# EAGLE board ADXL362WakeOnShake-Panel-v11 (EAGLE 6.5.0), part 1 of 3
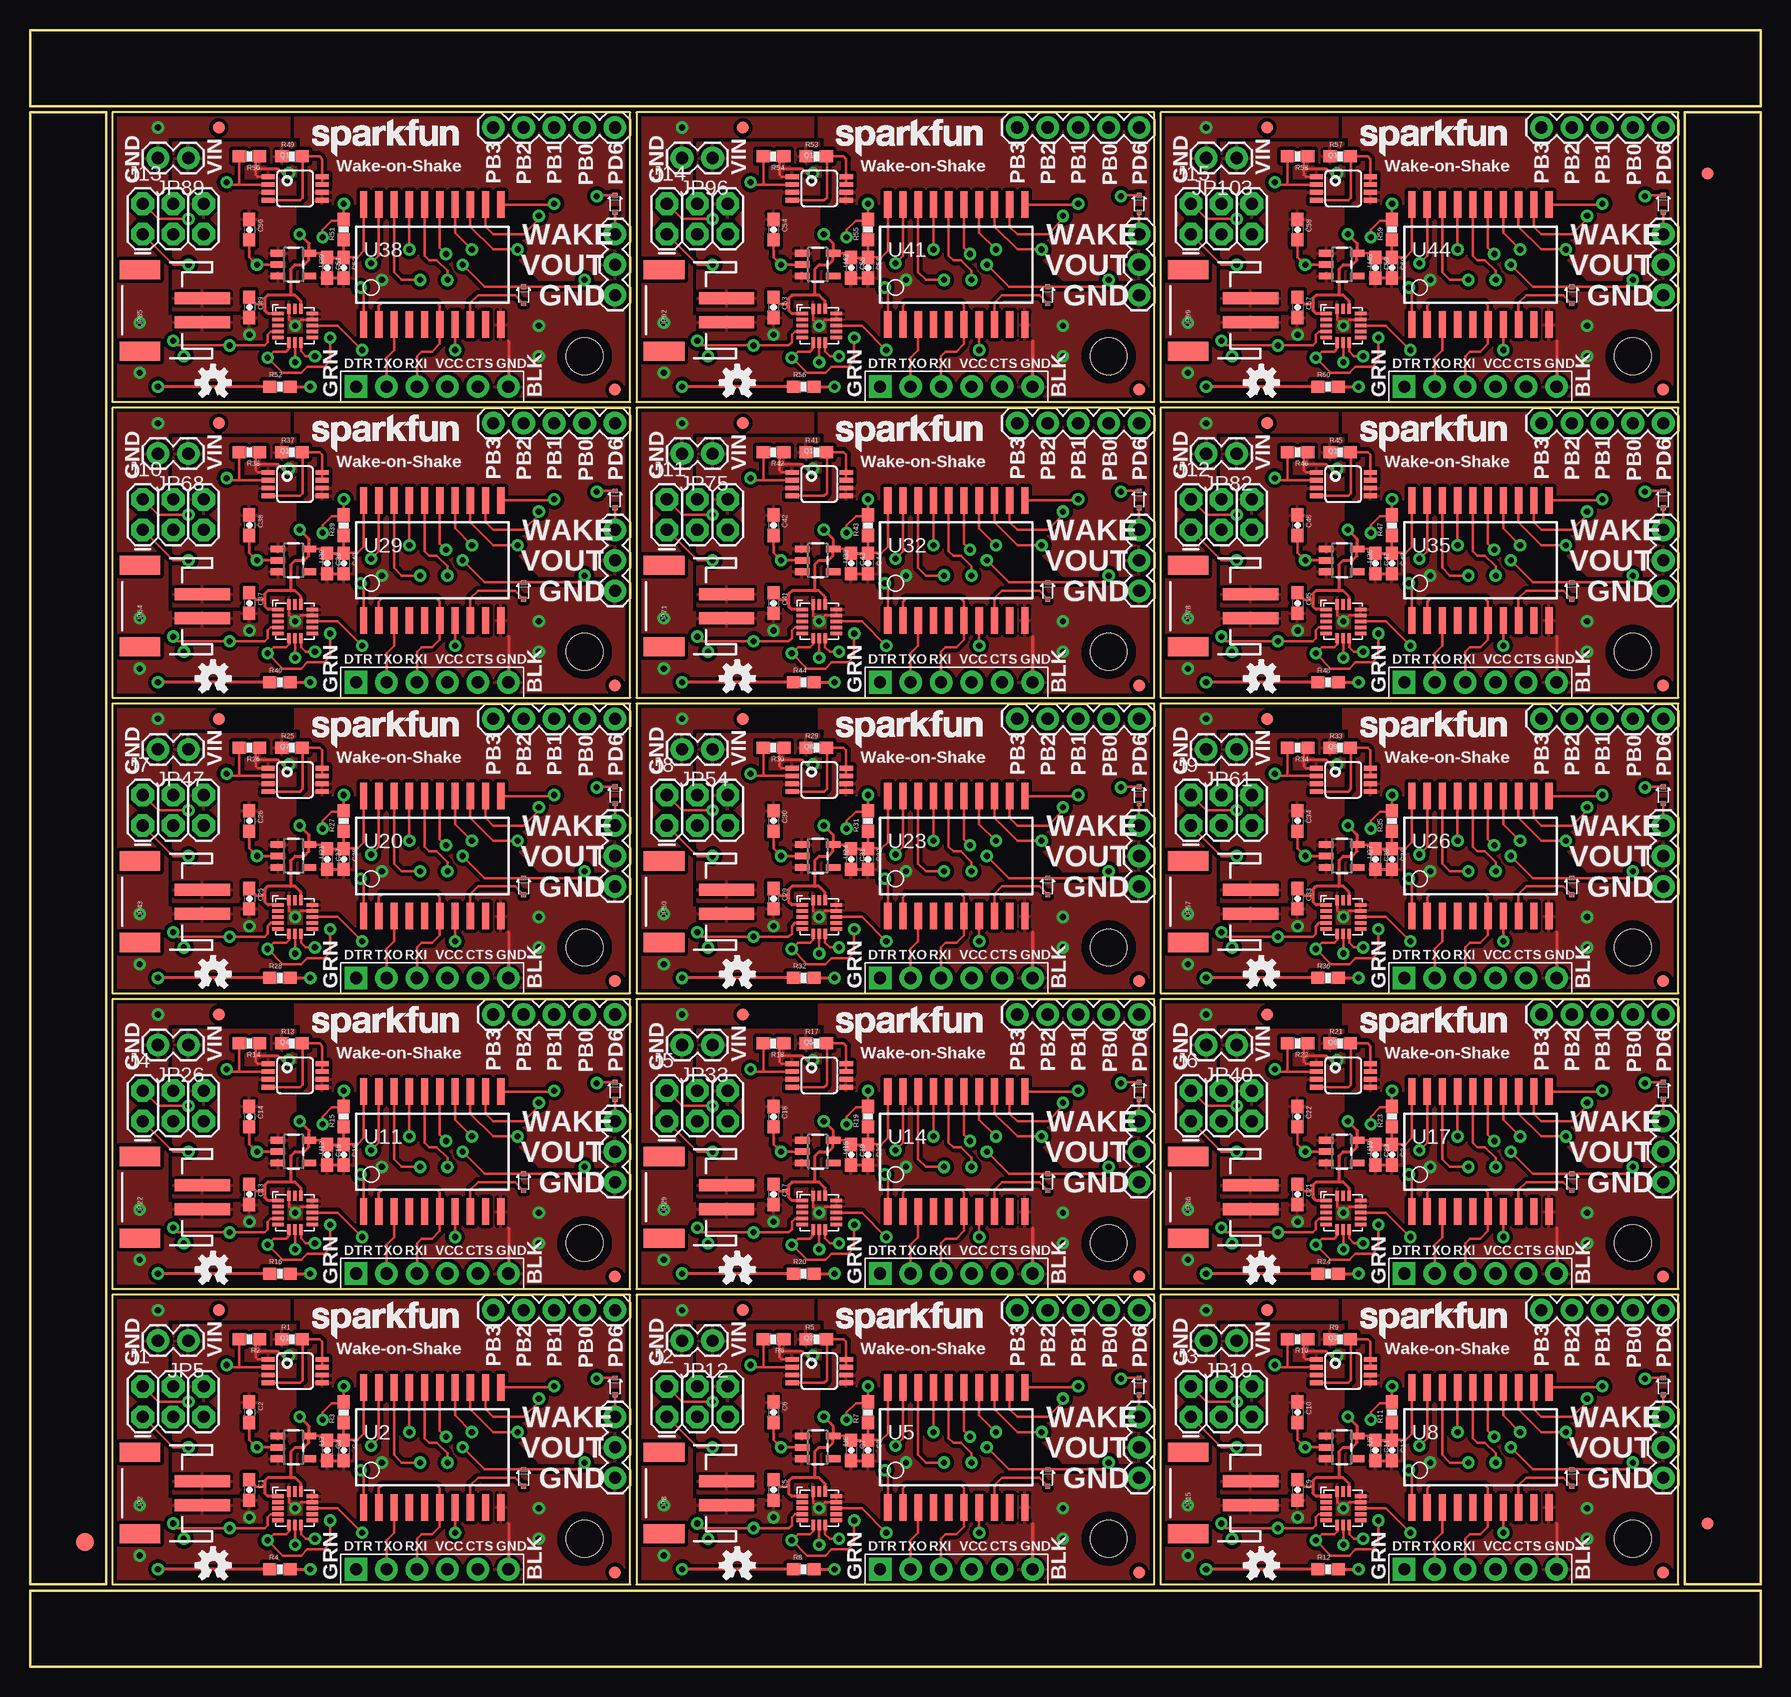
[diagram p0: board, top side]
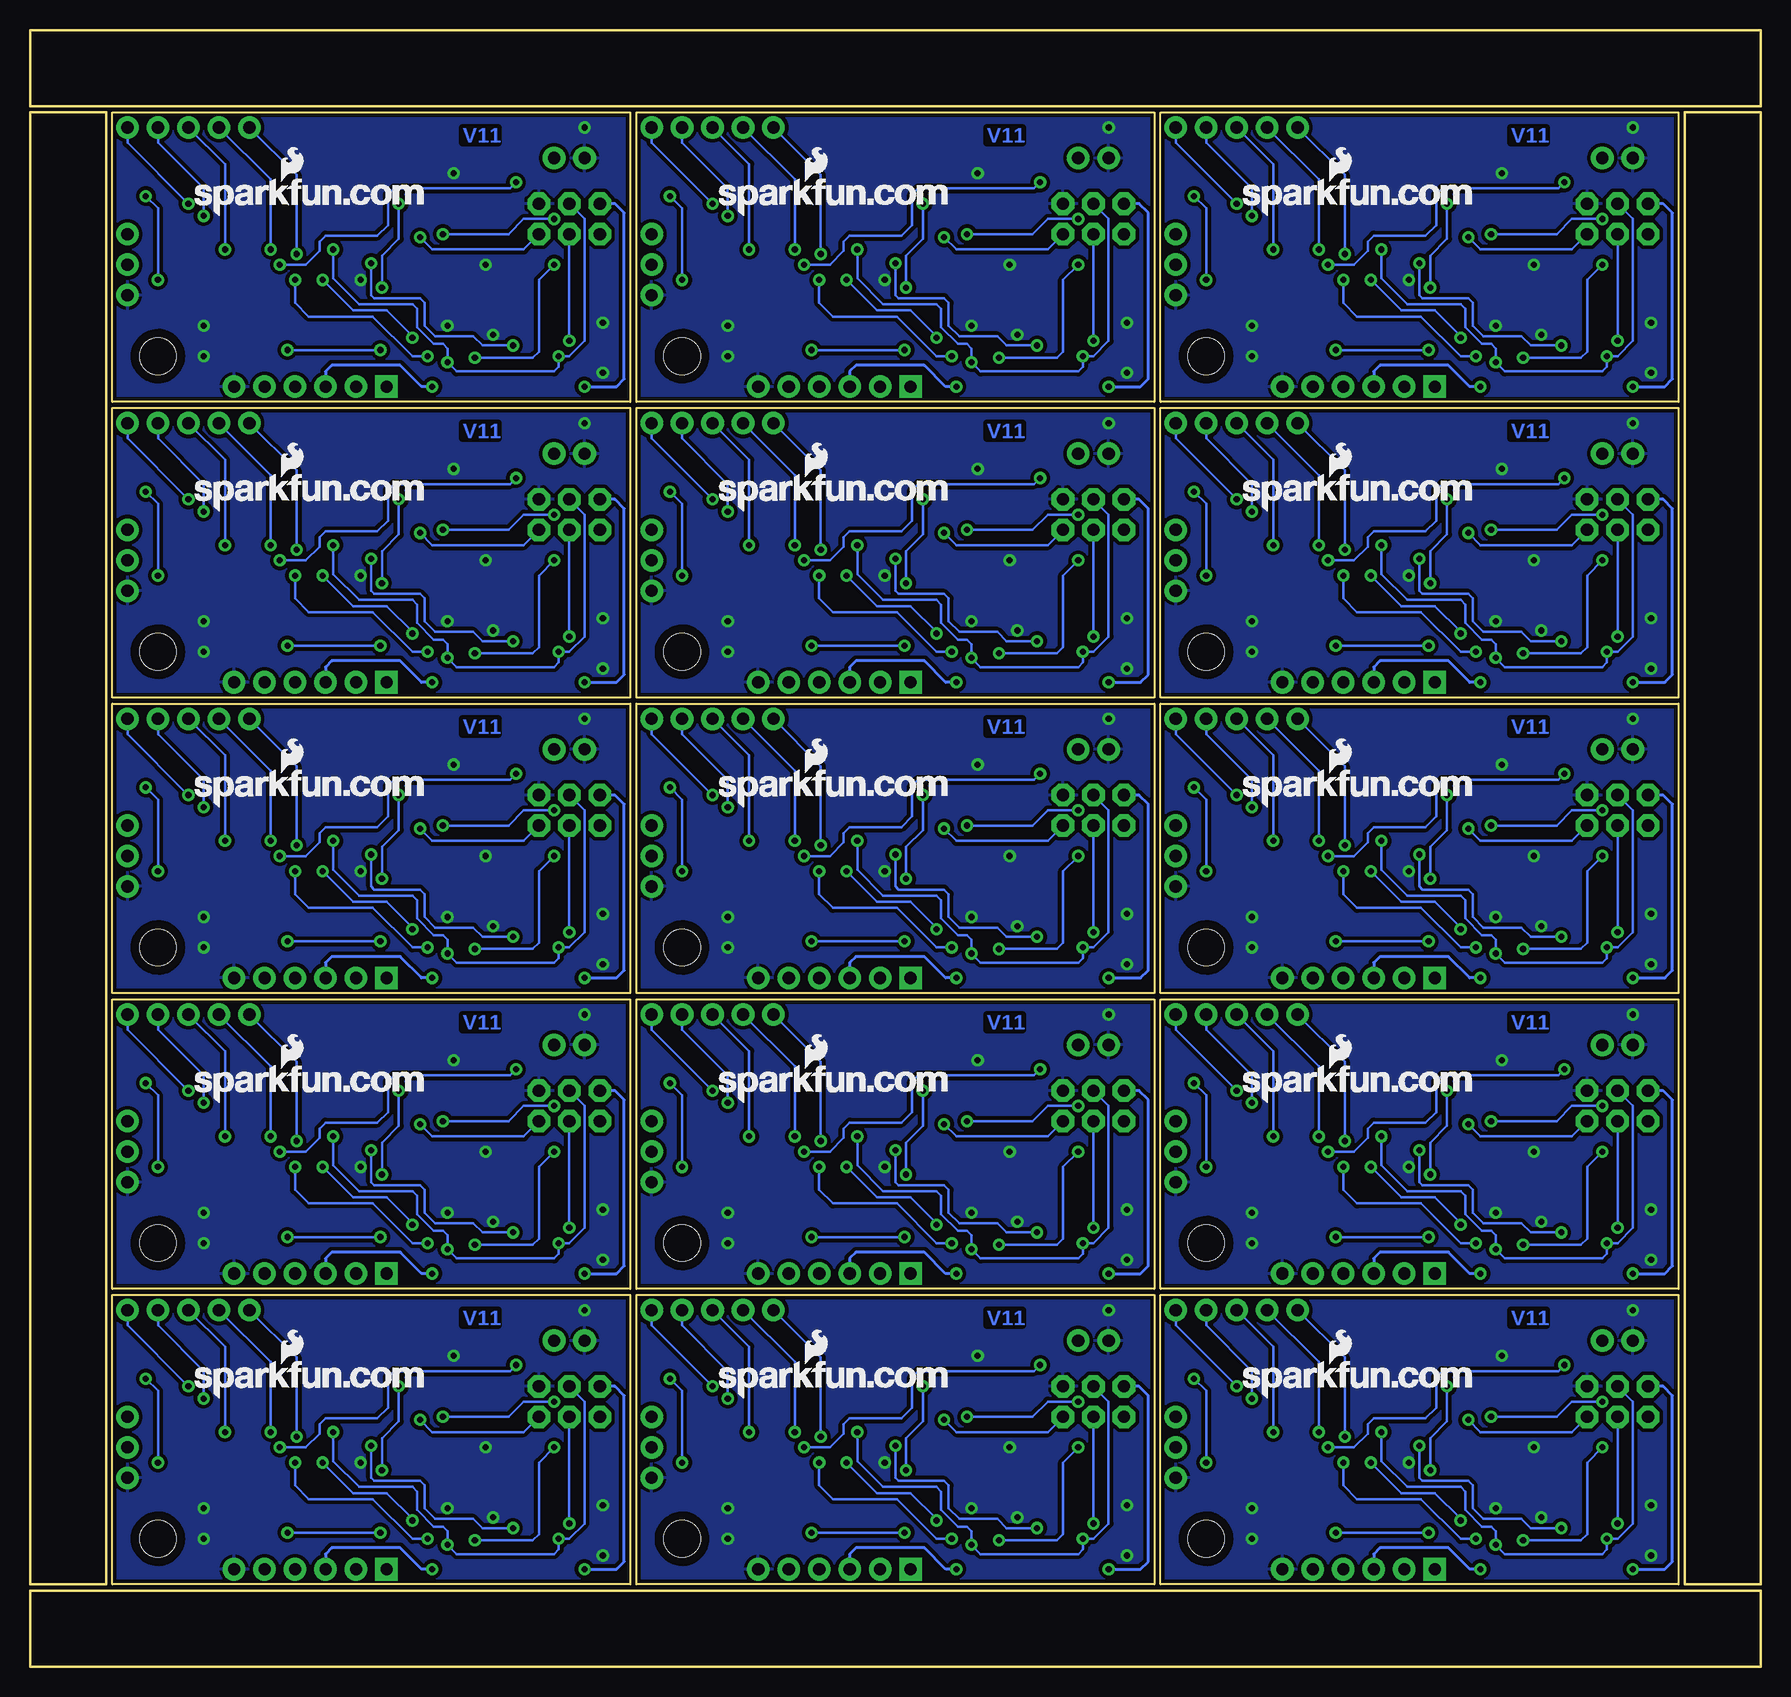
[diagram p1: board, bottom side, seen from below]

Size 144.27 x 136.4 mm. Coordinates in mm from the lower left corner, seen from the top.
Outline: 6.86,6.86 50.04,6.86 50.04,30.99 6.86,30.99 6.86,6.86
Outline: 50.55,6.86 93.73,6.86 93.73,30.99 50.55,30.99 50.55,6.86
Outline: 94.23,6.86 137.41,6.86 137.41,30.99 94.23,30.99 94.23,6.86
Outline: 6.86,31.5 50.04,31.5 50.04,55.63 6.86,55.63 6.86,31.5
Outline: 50.55,31.5 93.73,31.5 93.73,55.63 50.55,55.63 50.55,31.5
Outline: 94.23,31.5 137.41,31.5 137.41,55.63 94.23,55.63 94.23,31.5
Outline: 6.86,56.13 50.04,56.13 50.04,80.26 6.86,80.26 6.86,56.13
Outline: 50.55,56.13 93.73,56.13 93.73,80.26 50.55,80.26 50.55,56.13
Outline: 94.23,56.13 137.41,56.13 137.41,80.26 94.23,80.26 94.23,56.13
Outline: 6.86,80.77 50.04,80.77 50.04,104.9 6.86,104.9 6.86,80.77
Outline: 50.55,80.77 93.73,80.77 93.73,104.9 50.55,104.9 50.55,80.77
Outline: 94.23,80.77 137.41,80.77 137.41,104.9 94.23,104.9 94.23,80.77
Outline: 6.86,105.41 50.04,105.41 50.04,129.54 6.86,129.54 6.86,105.41
Outline: 50.55,105.41 93.73,105.41 93.73,129.54 50.55,129.54 50.55,105.41
Outline: 94.23,105.41 137.41,105.41 137.41,129.54 94.23,129.54 94.23,105.41
Outline: 6.35,6.86 6.35,129.54 0,129.54 0,6.86 6.35,6.86
Outline: 0,0 144.27,0 144.27,6.35 0,6.35 0,0
Outline: 144.27,6.86 144.27,129.54 137.92,129.54 137.92,6.86 144.27,6.86
Outline: 144.27,136.4 0,136.4 0,130.05 144.27,130.05 144.27,136.4
Copper layers (1*16): Top 0.035mm / dielectric 1.5mm / Bottom 0.035mm
Design rules "SparkFun-2-layer": minimum track width 7mil, minimum drill 15mil, track to track 8mil, track to pad 8mil, pad to pad 8mil, via to via 8mil, smd to smd 8mil, copper to edge 8mil, drill to drill 8mil, minimum pad ring 12mil, minimum via ring 10mil, stop-mask expansion 4mil, vias tented up to drill 20mil, thermal gap 10mil

## Footprints (pad centres in the part's own frame; a part is rotated, then mirrored left to right if it is on the bottom)
0603-CAP = smd 1.1 x 1: 1 -0.85,0; 2 0.85,0
SOD-523 = smd 0.4 x 0.4: A -0.7,0; C 0.7,0
FIDUCIAL-1.5X3 = smd 1.5 x 1.5: 1 0,0
FIDUCIAL-1X2 = smd 1 x 1: 1 0,0
2X3 = drill 1.016 pad 1.88 octagon: 1 0,0; 2 0,2.54; 3 2.54,0; 4 2.54,2.54; 5 5.08,0; 6 5.08,2.54
FTDI_DEVICE_SIDE = drill 1.016 pad 1.88 square: P$1 -6.35,0 | drill 1.016 pad 1.88: P$2 -3.81,0; P$3 -1.27,0; P$4 1.27,0; P$5 3.81,0; P$6 6.35,0
JST-2-SMD = smd 1 x 4.6: 1 -1,-3.7; 2 1,-3.7 | smd 1.6 x 3.4: NC1 -3.4,1.5; NC2 3.4,1.5
1X03 = drill 1.016 pad 1.88: 1 0,0; 2 2.54,0; 3 5.08,0
1X02 = drill 1.016 pad 1.88: 1 0,0; 2 2.54,0
1X05 = drill 1.016 pad 1.88: 1 0,0; 2 2.54,0; 3 5.08,0; 4 7.62,0; 5 10.16,0
MSOP8 = smd 0.4 x 1.1: 1 -0.975,-2.25; 2 -0.325,-2.25; 3 0.325,-2.25; 4 0.975,-2.25; 5 0.975,2.25; 6 0.325,2.25; 7 -0.325,2.25; 8 -0.975,2.25
0603-RES = smd 1.1 x 1: 1 -0.85,0; 2 0.85,0
ADXL362-1:1 = smd 0.952 x 0.3: P$1 -1.426,1; P$2 -1.426,0.5; P$3 -1.426,0; P$4 -1.426,-0.5; P$5 -1.426,-1; P$9 1.426,-1; P$10 1.426,-0.5; P$11 1.426,0; P$12 1.426,0.5; P$13 1.426,1 | smd 0.3 x 0.851: P$6 -0.5,-1.402; P$7 0,-1.402; P$8 0.5,-1.402; P$14 0.5,1.402; P$15 0,1.402; P$16 -0.5,1.402
SOP20W = smd 0.6 x 2.2: 1 -5.715,-5; 2 -4.445,-5; 3 -3.175,-5; 4 -1.905,-5; 5 -0.635,-5; 6 0.635,-5; 7 1.905,-5; 8 3.175,-5; 9 4.445,-5; 10 5.715,-5; 11 5.715,5; 12 4.445,5; 13 3.175,5; 14 1.905,5; 15 0.635,5; 16 -0.635,5; 17 -1.905,5; 18 -3.175,5; 19 -4.445,5; 20 -5.715,5
SOT23-5 = smd 0.55 x 1.2: 1 -0.95,-1.3; 2 0,-1.3; 3 0.95,-1.3; 4 0.95,1.3; 5 -0.95,1.3
STAND-OFF-TIGHT = hole 3.048: 0,0

## Placement (x,y rotation side)
C1  .1uF  [0603-CAP]  18.29,14.73 270 top
C2  1uF  [0603-CAP]  18.29,21.21 270 top
C3  1uF  [0603-CAP]  24.77,18.03 270 top
C4  .1uF  [0603-CAP]  26.16,18.03 270 top
C5  .1uF  [0603-CAP]  61.98,14.73 270 top
C6  1uF  [0603-CAP]  61.98,21.21 270 top
C7  1uF  [0603-CAP]  68.45,18.03 270 top
C8  .1uF  [0603-CAP]  69.85,18.03 270 top
C9  .1uF  [0603-CAP]  105.66,14.73 270 top
C10  1uF  [0603-CAP]  105.66,21.21 270 top
C11  1uF  [0603-CAP]  112.14,18.03 270 top
C12  .1uF  [0603-CAP]  113.54,18.03 270 top
C13  .1uF  [0603-CAP]  18.29,39.37 270 top
C14  1uF  [0603-CAP]  18.29,45.85 270 top
C15  1uF  [0603-CAP]  24.77,42.67 270 top
C16  .1uF  [0603-CAP]  26.16,42.67 270 top
C17  .1uF  [0603-CAP]  61.98,39.37 270 top
C18  1uF  [0603-CAP]  61.98,45.85 270 top
C19  1uF  [0603-CAP]  68.45,42.67 270 top
C20  .1uF  [0603-CAP]  69.85,42.67 270 top
C21  .1uF  [0603-CAP]  105.66,39.37 270 top
C22  1uF  [0603-CAP]  105.66,45.85 270 top
C23  1uF  [0603-CAP]  112.14,42.67 270 top
C24  .1uF  [0603-CAP]  113.54,42.67 270 top
C25  .1uF  [0603-CAP]  18.29,64.01 270 top
C26  1uF  [0603-CAP]  18.29,70.48 270 top
C27  1uF  [0603-CAP]  24.77,67.31 270 top
C28  .1uF  [0603-CAP]  26.16,67.31 270 top
C29  .1uF  [0603-CAP]  61.98,64.01 270 top
C30  1uF  [0603-CAP]  61.98,70.48 270 top
C31  1uF  [0603-CAP]  68.45,67.31 270 top
C32  .1uF  [0603-CAP]  69.85,67.31 270 top
C33  .1uF  [0603-CAP]  105.66,64.01 270 top
C34  1uF  [0603-CAP]  105.66,70.48 270 top
C35  1uF  [0603-CAP]  112.14,67.31 270 top
C36  .1uF  [0603-CAP]  113.54,67.31 270 top
C37  .1uF  [0603-CAP]  18.29,88.65 270 top
C38  1uF  [0603-CAP]  18.29,95.12 270 top
C39  1uF  [0603-CAP]  24.77,91.95 270 top
C40  .1uF  [0603-CAP]  26.16,91.95 270 top
C41  .1uF  [0603-CAP]  61.98,88.65 270 top
C42  1uF  [0603-CAP]  61.98,95.12 270 top
C43  1uF  [0603-CAP]  68.45,91.95 270 top
C44  .1uF  [0603-CAP]  69.85,91.95 270 top
C45  .1uF  [0603-CAP]  105.66,88.65 270 top
C46  1uF  [0603-CAP]  105.66,95.12 270 top
C47  1uF  [0603-CAP]  112.14,91.95 270 top
C48  .1uF  [0603-CAP]  113.54,91.95 270 top
C49  .1uF  [0603-CAP]  18.29,113.28 270 top
C50  1uF  [0603-CAP]  18.29,119.76 270 top
C51  1uF  [0603-CAP]  24.77,116.59 270 top
C52  .1uF  [0603-CAP]  26.16,116.59 270 top
C53  .1uF  [0603-CAP]  61.98,113.28 270 top
C54  1uF  [0603-CAP]  61.98,119.76 270 top
C55  1uF  [0603-CAP]  68.45,116.59 270 top
C56  .1uF  [0603-CAP]  69.85,116.59 270 top
C57  .1uF  [0603-CAP]  105.66,113.28 270 top
C58  1uF  [0603-CAP]  105.66,119.76 270 top
C59  1uF  [0603-CAP]  112.14,116.59 270 top
C60  .1uF  [0603-CAP]  113.54,116.59 270 top
D1  RB751  [SOD-523]  48.77,23.37 90 top
D2  RB751  [SOD-523]  41.15,15.75 90 top
D3  RB751  [SOD-523]  92.46,23.37 90 top
D4  RB751  [SOD-523]  84.84,15.75 90 top
D5  RB751  [SOD-523]  136.14,23.37 90 top
D6  RB751  [SOD-523]  128.52,15.75 90 top
D7  RB751  [SOD-523]  48.77,48.01 90 top
D8  RB751  [SOD-523]  41.15,40.39 90 top
D9  RB751  [SOD-523]  92.46,48.01 90 top
D10  RB751  [SOD-523]  84.84,40.39 90 top
D11  RB751  [SOD-523]  136.14,48.01 90 top
D12  RB751  [SOD-523]  128.52,40.39 90 top
D13  RB751  [SOD-523]  48.77,72.64 90 top
D14  RB751  [SOD-523]  41.15,65.02 90 top
D15  RB751  [SOD-523]  92.46,72.64 90 top
D16  RB751  [SOD-523]  84.84,65.02 90 top
D17  RB751  [SOD-523]  136.14,72.64 90 top
D18  RB751  [SOD-523]  128.52,65.02 90 top
D19  RB751  [SOD-523]  48.77,97.28 90 top
D20  RB751  [SOD-523]  41.15,89.66 90 top
D21  RB751  [SOD-523]  92.46,97.28 90 top
D22  RB751  [SOD-523]  84.84,89.66 90 top
D23  RB751  [SOD-523]  136.14,97.28 90 top
D24  RB751  [SOD-523]  128.52,89.66 90 top
D25  RB751  [SOD-523]  48.77,121.92 90 top
D26  RB751  [SOD-523]  41.15,114.3 90 top
D27  RB751  [SOD-523]  92.46,121.92 90 top
D28  RB751  [SOD-523]  84.84,114.3 90 top
D29  RB751  [SOD-523]  136.14,121.92 90 top
D30  RB751  [SOD-523]  128.52,114.3 90 top
E$1  [FIDUCIAL-1.5X3]  4.57,10.41 0 top
E$4  [FIDUCIAL-1X2]  139.83,11.94 0 top
E$5  [FIDUCIAL-1X2]  139.83,124.46 180 top
FID1  FIDUCIAL1X2  [FIDUCIAL-1X2]  48.77,7.87 0 top
FID2  FIDUCIAL1X2  [FIDUCIAL-1X2]  15.75,29.72 0 top
FID3  FIDUCIAL1X2  [FIDUCIAL-1X2]  92.46,7.87 0 top
FID4  FIDUCIAL1X2  [FIDUCIAL-1X2]  59.44,29.72 0 top
FID5  FIDUCIAL1X2  [FIDUCIAL-1X2]  136.14,7.87 0 top
FID6  FIDUCIAL1X2  [FIDUCIAL-1X2]  103.12,29.72 0 top
FID7  FIDUCIAL1X2  [FIDUCIAL-1X2]  48.77,32.51 0 top
FID8  FIDUCIAL1X2  [FIDUCIAL-1X2]  15.75,54.36 0 top
FID9  FIDUCIAL1X2  [FIDUCIAL-1X2]  92.46,32.51 0 top
FID10  FIDUCIAL1X2  [FIDUCIAL-1X2]  59.44,54.36 0 top
FID11  FIDUCIAL1X2  [FIDUCIAL-1X2]  136.14,32.51 0 top
FID12  FIDUCIAL1X2  [FIDUCIAL-1X2]  103.12,54.36 0 top
FID13  FIDUCIAL1X2  [FIDUCIAL-1X2]  48.77,57.15 0 top
FID14  FIDUCIAL1X2  [FIDUCIAL-1X2]  15.75,78.99 0 top
FID15  FIDUCIAL1X2  [FIDUCIAL-1X2]  92.46,57.15 0 top
FID16  FIDUCIAL1X2  [FIDUCIAL-1X2]  59.44,78.99 0 top
FID17  FIDUCIAL1X2  [FIDUCIAL-1X2]  136.14,57.15 0 top
FID18  FIDUCIAL1X2  [FIDUCIAL-1X2]  103.12,78.99 0 top
FID19  FIDUCIAL1X2  [FIDUCIAL-1X2]  48.77,81.79 0 top
FID20  FIDUCIAL1X2  [FIDUCIAL-1X2]  15.75,103.63 0 top
FID21  FIDUCIAL1X2  [FIDUCIAL-1X2]  92.46,81.79 0 top
FID22  FIDUCIAL1X2  [FIDUCIAL-1X2]  59.44,103.63 0 top
FID23  FIDUCIAL1X2  [FIDUCIAL-1X2]  136.14,81.79 0 top
FID24  FIDUCIAL1X2  [FIDUCIAL-1X2]  103.12,103.63 0 top
FID25  FIDUCIAL1X2  [FIDUCIAL-1X2]  48.77,106.43 0 top
FID26  FIDUCIAL1X2  [FIDUCIAL-1X2]  15.75,128.27 0 top
FID27  FIDUCIAL1X2  [FIDUCIAL-1X2]  92.46,106.43 0 top
FID28  FIDUCIAL1X2  [FIDUCIAL-1X2]  59.44,128.27 0 top
FID29  FIDUCIAL1X2  [FIDUCIAL-1X2]  136.14,106.43 0 top
FID30  FIDUCIAL1X2  [FIDUCIAL-1X2]  103.12,128.27 0 top
J1  PROG_HDR  [2X3]  9.4,20.83 0 top
J2  PROG_HDR  [2X3]  53.09,20.83 0 top
J3  PROG_HDR  [2X3]  96.77,20.83 0 top
J4  PROG_HDR  [2X3]  9.4,45.47 0 top
J5  PROG_HDR  [2X3]  53.09,45.47 0 top
J6  PROG_HDR  [2X3]  96.77,45.47 0 top
J7  PROG_HDR  [2X3]  9.4,70.1 0 top
J8  PROG_HDR  [2X3]  53.09,70.1 0 top
J9  PROG_HDR  [2X3]  96.77,70.1 0 top
J10  PROG_HDR  [2X3]  9.4,94.74 0 top
J11  PROG_HDR  [2X3]  53.09,94.74 0 top
J12  PROG_HDR  [2X3]  96.77,94.74 0 top
J13  PROG_HDR  [2X3]  9.4,119.38 0 top
J14  PROG_HDR  [2X3]  53.09,119.38 0 top
J15  PROG_HDR  [2X3]  96.77,119.38 0 top
JP1  FTDI_DEVICE  [FTDI_DEVICE_SIDE]  33.53,8.13 0 top
JP2  M02-JST-2MM-SMT  [JST-2-SMD]  10.67,14.48 90 top
JP3  [1X03]  48.77,20.83 270 top
JP4  LOGO-SFENW2  [SFE-NEW-WEB]  23.5,27.3 0 top
JP5  M02PTH  [1X02]  13.21,27.18 180 top
JP6  LOGO-SFENEW  [SFE-NEW-WEBLOGO]  43.18,22.35 0 bottom
JP7  [1X05]  38.61,29.72 0 top
JP8  M02-JST-2MM-SMT  [JST-2-SMD]  54.36,14.48 90 top
JP9  [1X03]  92.46,20.83 270 top
JP10  FTDI_DEVICE  [FTDI_DEVICE_SIDE]  77.22,8.13 0 top
JP11  LOGO-SFENW2  [SFE-NEW-WEB]  67.18,27.3 0 top
JP12  M02PTH  [1X02]  56.9,27.18 180 top
JP13  LOGO-SFENEW  [SFE-NEW-WEBLOGO]  86.87,22.35 0 bottom
JP14  [1X05]  82.3,29.72 0 top
JP15  M02-JST-2MM-SMT  [JST-2-SMD]  98.04,14.48 90 top
JP16  [1X03]  136.14,20.83 270 top
JP17  FTDI_DEVICE  [FTDI_DEVICE_SIDE]  120.9,8.13 0 top
JP18  LOGO-SFENW2  [SFE-NEW-WEB]  110.87,27.3 0 top
JP19  M02PTH  [1X02]  100.58,27.18 180 top
JP20  LOGO-SFENEW  [SFE-NEW-WEBLOGO]  130.56,22.35 0 bottom
JP21  [1X05]  125.98,29.72 0 top
JP22  M02-JST-2MM-SMT  [JST-2-SMD]  10.67,39.12 90 top
JP23  [1X03]  48.77,45.47 270 top
JP24  FTDI_DEVICE  [FTDI_DEVICE_SIDE]  33.53,32.77 0 top
JP25  LOGO-SFENW2  [SFE-NEW-WEB]  23.5,51.94 0 top
JP26  M02PTH  [1X02]  13.21,51.82 180 top
JP27  LOGO-SFENEW  [SFE-NEW-WEBLOGO]  43.18,46.99 0 bottom
JP28  [1X05]  38.61,54.36 0 top
JP29  M02-JST-2MM-SMT  [JST-2-SMD]  54.36,39.12 90 top
JP30  [1X03]  92.46,45.47 270 top
JP31  FTDI_DEVICE  [FTDI_DEVICE_SIDE]  77.22,32.77 0 top
JP32  LOGO-SFENW2  [SFE-NEW-WEB]  67.18,51.94 0 top
JP33  M02PTH  [1X02]  56.9,51.82 180 top
JP34  LOGO-SFENEW  [SFE-NEW-WEBLOGO]  86.87,46.99 0 bottom
JP35  [1X05]  82.3,54.36 0 top
JP36  M02-JST-2MM-SMT  [JST-2-SMD]  98.04,39.12 90 top
JP37  [1X03]  136.14,45.47 270 top
JP38  FTDI_DEVICE  [FTDI_DEVICE_SIDE]  120.9,32.77 0 top
JP39  LOGO-SFENW2  [SFE-NEW-WEB]  110.87,51.94 0 top
JP40  M02PTH  [1X02]  100.58,51.82 180 top
JP41  LOGO-SFENEW  [SFE-NEW-WEBLOGO]  130.56,46.99 0 bottom
JP42  [1X05]  125.98,54.36 0 top
JP43  M02-JST-2MM-SMT  [JST-2-SMD]  10.67,63.75 90 top
JP44  [1X03]  48.77,70.1 270 top
JP45  FTDI_DEVICE  [FTDI_DEVICE_SIDE]  33.53,57.4 0 top
JP46  LOGO-SFENW2  [SFE-NEW-WEB]  23.5,76.58 0 top
JP47  M02PTH  [1X02]  13.21,76.45 180 top
JP48  LOGO-SFENEW  [SFE-NEW-WEBLOGO]  43.18,71.63 0 bottom
JP49  [1X05]  38.61,78.99 0 top
JP50  M02-JST-2MM-SMT  [JST-2-SMD]  54.36,63.75 90 top
JP51  [1X03]  92.46,70.1 270 top
JP52  FTDI_DEVICE  [FTDI_DEVICE_SIDE]  77.22,57.4 0 top
JP53  LOGO-SFENW2  [SFE-NEW-WEB]  67.18,76.58 0 top
JP54  M02PTH  [1X02]  56.9,76.45 180 top
JP55  LOGO-SFENEW  [SFE-NEW-WEBLOGO]  86.87,71.63 0 bottom
JP56  [1X05]  82.3,78.99 0 top
JP57  M02-JST-2MM-SMT  [JST-2-SMD]  98.04,63.75 90 top
JP58  [1X03]  136.14,70.1 270 top
JP59  FTDI_DEVICE  [FTDI_DEVICE_SIDE]  120.9,57.4 0 top
JP60  LOGO-SFENW2  [SFE-NEW-WEB]  110.87,76.58 0 top
JP61  M02PTH  [1X02]  100.58,76.45 180 top
JP62  LOGO-SFENEW  [SFE-NEW-WEBLOGO]  130.56,71.63 0 bottom
JP63  [1X05]  125.98,78.99 0 top
JP64  M02-JST-2MM-SMT  [JST-2-SMD]  10.67,88.39 90 top
JP65  [1X03]  48.77,94.74 270 top
JP66  FTDI_DEVICE  [FTDI_DEVICE_SIDE]  33.53,82.04 0 top
JP67  LOGO-SFENW2  [SFE-NEW-WEB]  23.5,101.22 0 top
JP68  M02PTH  [1X02]  13.21,101.09 180 top
JP69  LOGO-SFENEW  [SFE-NEW-WEBLOGO]  43.18,96.27 0 bottom
JP70  [1X05]  38.61,103.63 0 top
JP71  M02-JST-2MM-SMT  [JST-2-SMD]  54.36,88.39 90 top
JP72  [1X03]  92.46,94.74 270 top
JP73  FTDI_DEVICE  [FTDI_DEVICE_SIDE]  77.22,82.04 0 top
JP74  LOGO-SFENW2  [SFE-NEW-WEB]  67.18,101.22 0 top
JP75  M02PTH  [1X02]  56.9,101.09 180 top
JP76  LOGO-SFENEW  [SFE-NEW-WEBLOGO]  86.87,96.27 0 bottom
JP77  [1X05]  82.3,103.63 0 top
JP78  M02-JST-2MM-SMT  [JST-2-SMD]  98.04,88.39 90 top
JP79  [1X03]  136.14,94.74 270 top
JP80  FTDI_DEVICE  [FTDI_DEVICE_SIDE]  120.9,82.04 0 top
JP81  LOGO-SFENW2  [SFE-NEW-WEB]  110.87,101.22 0 top
JP82  M02PTH  [1X02]  100.58,101.09 180 top
JP83  LOGO-SFENEW  [SFE-NEW-WEBLOGO]  130.56,96.27 0 bottom
JP84  [1X05]  125.98,103.63 0 top
JP85  M02-JST-2MM-SMT  [JST-2-SMD]  10.67,113.03 90 top
JP86  [1X03]  48.77,119.38 270 top
JP87  FTDI_DEVICE  [FTDI_DEVICE_SIDE]  33.53,106.68 0 top
JP88  LOGO-SFENW2  [SFE-NEW-WEB]  23.5,125.86 0 top
JP89  M02PTH  [1X02]  13.21,125.73 180 top
JP90  LOGO-SFENEW  [SFE-NEW-WEBLOGO]  43.18,120.9 0 bottom
JP91  [1X05]  38.61,128.27 0 top
JP92  M02-JST-2MM-SMT  [JST-2-SMD]  54.36,113.03 90 top
JP93  [1X03]  92.46,119.38 270 top
JP94  FTDI_DEVICE  [FTDI_DEVICE_SIDE]  77.22,106.68 0 top
JP95  LOGO-SFENW2  [SFE-NEW-WEB]  67.18,125.86 0 top
JP96  M02PTH  [1X02]  56.9,125.73 180 top
JP97  LOGO-SFENEW  [SFE-NEW-WEBLOGO]  86.87,120.9 0 bottom
JP98  [1X05]  82.3,128.27 0 top
JP99  M02-JST-2MM-SMT  [JST-2-SMD]  98.04,113.03 90 top
JP100  [1X03]  136.14,119.38 270 top
JP101  FTDI_DEVICE  [FTDI_DEVICE_SIDE]  120.9,106.68 0 top
JP102  LOGO-SFENW2  [SFE-NEW-WEB]  110.87,125.86 0 top
JP103  M02PTH  [1X02]  100.58,125.73 180 top
JP104  LOGO-SFENEW  [SFE-NEW-WEBLOGO]  130.56,120.9 0 bottom
JP105  [1X05]  125.98,128.27 0 top
Q1  [MSOP8]  22.1,24.64 270 top
Q2  [MSOP8]  65.79,24.64 270 top
Q3  [MSOP8]  109.47,24.64 270 top
Q4  [MSOP8]  22.1,49.28 270 top
Q5  [MSOP8]  65.79,49.28 270 top
Q6  [MSOP8]  109.47,49.28 270 top
Q7  [MSOP8]  22.1,73.91 270 top
Q8  [MSOP8]  65.79,73.91 270 top
Q9  [MSOP8]  109.47,73.91 270 top
Q10  [MSOP8]  22.1,98.55 270 top
Q11  [MSOP8]  65.79,98.55 270 top
Q12  [MSOP8]  109.47,98.55 270 top
Q13  [MSOP8]  22.1,123.19 270 top
Q14  [MSOP8]  65.79,123.19 270 top
Q15  [MSOP8]  109.47,123.19 270 top
R1  1M  [0603-RES]  21.84,27.3 0 top
R2  1M  [0603-RES]  18.29,27.3 180 top
R3  10k  [0603-RES]  26.16,21.21 90 top
R4  10k  [0603-RES]  20.83,8.13 0 top
R5  1M  [0603-RES]  65.53,27.3 0 top
R6  1M  [0603-RES]  61.98,27.3 180 top
R7  10k  [0603-RES]  69.85,21.21 90 top
R8  10k  [0603-RES]  64.52,8.13 0 top
R9  1M  [0603-RES]  109.22,27.3 0 top
R10  1M  [0603-RES]  105.66,27.3 180 top
R11  10k  [0603-RES]  113.54,21.21 90 top
R12  10k  [0603-RES]  108.2,8.13 0 top
R13  1M  [0603-RES]  21.84,51.94 0 top
R14  1M  [0603-RES]  18.29,51.94 180 top
R15  10k  [0603-RES]  26.16,45.85 90 top
R16  10k  [0603-RES]  20.83,32.77 0 top
R17  1M  [0603-RES]  65.53,51.94 0 top
R18  1M  [0603-RES]  61.98,51.94 180 top
R19  10k  [0603-RES]  69.85,45.85 90 top
R20  10k  [0603-RES]  64.52,32.77 0 top
R21  1M  [0603-RES]  109.22,51.94 0 top
R22  1M  [0603-RES]  105.66,51.94 180 top
R23  10k  [0603-RES]  113.54,45.85 90 top
R24  10k  [0603-RES]  108.2,32.77 0 top
R25  1M  [0603-RES]  21.84,76.58 0 top
R26  1M  [0603-RES]  18.29,76.58 180 top
R27  10k  [0603-RES]  26.16,70.48 90 top
R28  10k  [0603-RES]  20.83,57.4 0 top
R29  1M  [0603-RES]  65.53,76.58 0 top
R30  1M  [0603-RES]  61.98,76.58 180 top
R31  10k  [0603-RES]  69.85,70.48 90 top
R32  10k  [0603-RES]  64.52,57.4 0 top
R33  1M  [0603-RES]  109.22,76.58 0 top
R34  1M  [0603-RES]  105.66,76.58 180 top
R35  10k  [0603-RES]  113.54,70.48 90 top
R36  10k  [0603-RES]  108.2,57.4 0 top
R37  1M  [0603-RES]  21.84,101.22 0 top
R38  1M  [0603-RES]  18.29,101.22 180 top
R39  10k  [0603-RES]  26.16,95.12 90 top
R40  10k  [0603-RES]  20.83,82.04 0 top
R41  1M  [0603-RES]  65.53,101.22 0 top
R42  1M  [0603-RES]  61.98,101.22 180 top
R43  10k  [0603-RES]  69.85,95.12 90 top
R44  10k  [0603-RES]  64.52,82.04 0 top
R45  1M  [0603-RES]  109.22,101.22 0 top
R46  1M  [0603-RES]  105.66,101.22 180 top
R47  10k  [0603-RES]  113.54,95.12 90 top
R48  10k  [0603-RES]  108.2,82.04 0 top
R49  1M  [0603-RES]  21.84,125.86 0 top
R50  1M  [0603-RES]  18.29,125.86 180 top
R51  10k  [0603-RES]  26.16,119.76 90 top
R52  10k  [0603-RES]  20.83,106.68 0 top
R53  1M  [0603-RES]  65.53,125.86 0 top
R54  1M  [0603-RES]  61.98,125.86 180 top
R55  10k  [0603-RES]  69.85,119.76 90 top
R56  10k  [0603-RES]  64.52,106.68 0 top
R57  1M  [0603-RES]  109.22,125.86 0 top
R58  1M  [0603-RES]  105.66,125.86 180 top
R59  10k  [0603-RES]  113.54,119.76 90 top
R60  10k  [0603-RES]  108.2,106.68 0 top
U1  ADXL362  [ADXL362-1:1]  22.1,13.21 0 top
U2  [SOP20W]  33.53,18.29 0 top
U3  ADP160-3.3  [SOT23-5]  21.97,18.29 270 top
U4  ADXL362  [ADXL362-1:1]  65.79,13.21 0 top
U5  [SOP20W]  77.22,18.29 0 top
U6  ADP160-3.3  [SOT23-5]  65.66,18.29 270 top
U7  ADXL362  [ADXL362-1:1]  109.47,13.21 0 top
U8  [SOP20W]  120.9,18.29 0 top
U9  ADP160-3.3  [SOT23-5]  109.35,18.29 270 top
U10  ADXL362  [ADXL362-1:1]  22.1,37.85 0 top
U11  [SOP20W]  33.53,42.93 0 top
U12  ADP160-3.3  [SOT23-5]  21.97,42.93 270 top
U13  ADXL362  [ADXL362-1:1]  65.79,37.85 0 top
U14  [SOP20W]  77.22,42.93 0 top
U15  ADP160-3.3  [SOT23-5]  65.66,42.93 270 top
U16  ADXL362  [ADXL362-1:1]  109.47,37.85 0 top
U17  [SOP20W]  120.9,42.93 0 top
U18  ADP160-3.3  [SOT23-5]  109.35,42.93 270 top
U19  ADXL362  [ADXL362-1:1]  22.1,62.48 0 top
U20  [SOP20W]  33.53,67.56 0 top
U21  ADP160-3.3  [SOT23-5]  21.97,67.56 270 top
U22  ADXL362  [ADXL362-1:1]  65.79,62.48 0 top
U23  [SOP20W]  77.22,67.56 0 top
U24  ADP160-3.3  [SOT23-5]  65.66,67.56 270 top
U25  ADXL362  [ADXL362-1:1]  109.47,62.48 0 top
U26  [SOP20W]  120.9,67.56 0 top
U27  ADP160-3.3  [SOT23-5]  109.35,67.56 270 top
U28  ADXL362  [ADXL362-1:1]  22.1,87.12 0 top
U29  [SOP20W]  33.53,92.2 0 top
U30  ADP160-3.3  [SOT23-5]  21.97,92.2 270 top
U31  ADXL362  [ADXL362-1:1]  65.79,87.12 0 top
U32  [SOP20W]  77.22,92.2 0 top
U33  ADP160-3.3  [SOT23-5]  65.66,92.2 270 top
U34  ADXL362  [ADXL362-1:1]  109.47,87.12 0 top
U35  [SOP20W]  120.9,92.2 0 top
U36  ADP160-3.3  [SOT23-5]  109.35,92.2 270 top
U37  ADXL362  [ADXL362-1:1]  22.1,111.76 0 top
U38  [SOP20W]  33.53,116.84 0 top
U39  ADP160-3.3  [SOT23-5]  21.97,116.84 270 top
U40  ADXL362  [ADXL362-1:1]  65.79,111.76 0 top
U41  [SOP20W]  77.22,116.84 0 top
U42  ADP160-3.3  [SOT23-5]  65.66,116.84 270 top
U43  ADXL362  [ADXL362-1:1]  109.47,111.76 0 top
U44  [SOP20W]  120.9,116.84 0 top
U45  ADP160-3.3  [SOT23-5]  109.35,116.84 270 top
U$1  [STAND-OFF-TIGHT]  89.92,10.67 0 top
U$2  [OSHW-LOGO-S]  58.95,8.46 0 top
U$3  [OSHW-LOGO-S]  15.27,8.46 0 top
U$4  [STAND-OFF-TIGHT]  46.23,10.67 0 top
U$5  [STAND-OFF-TIGHT]  133.6,10.67 0 top
U$6  [OSHW-LOGO-S]  102.64,8.46 0 top
U$7  [STAND-OFF-TIGHT]  46.23,35.31 0 top
U$8  [OSHW-LOGO-S]  15.27,33.1 0 top
U$9  [STAND-OFF-TIGHT]  89.92,35.31 0 top
U$10  [OSHW-LOGO-S]  58.95,33.1 0 top
U$11  [STAND-OFF-TIGHT]  133.6,35.31 0 top
U$12  [OSHW-LOGO-S]  102.64,33.1 0 top
U$13  [STAND-OFF-TIGHT]  46.23,59.94 0 top
U$14  [OSHW-LOGO-S]  15.27,57.73 0 top
U$15  [STAND-OFF-TIGHT]  89.92,59.94 0 top
U$16  [OSHW-LOGO-S]  58.95,57.73 0 top
U$17  [STAND-OFF-TIGHT]  133.6,59.94 0 top
U$18  [OSHW-LOGO-S]  102.64,57.73 0 top
U$19  [STAND-OFF-TIGHT]  46.23,84.58 0 top
U$20  [OSHW-LOGO-S]  15.27,82.37 0 top
U$21  [STAND-OFF-TIGHT]  89.92,84.58 0 top
U$22  [OSHW-LOGO-S]  58.95,82.37 0 top
U$23  [STAND-OFF-TIGHT]  133.6,84.58 0 top
U$24  [OSHW-LOGO-S]  102.64,82.37 0 top
U$25  [STAND-OFF-TIGHT]  46.23,109.22 0 top
U$26  [OSHW-LOGO-S]  15.27,107.01 0 top
U$27  [STAND-OFF-TIGHT]  89.92,109.22 0 top
U$28  [OSHW-LOGO-S]  58.95,107.01 0 top
U$29  [STAND-OFF-TIGHT]  133.6,109.22 0 top
U$30  [OSHW-LOGO-S]  102.64,107.01 0 top

## Library data of the parts
C1 C4 C5 C8 C9 C12 C13 C16 C17 C20 C21 C24 C25 C28 C29 C32 C33 C36 C37 C40 C41 C44 C45 C48 C49 C52 C53 C56 C57 C60 = SparkFun-Capacitors; PROD_ID: CAP-00810
C2 C3 C6 C7 C10 C11 C14 C15 C18 C19 C22 C23 C26 C27 C30 C31 C34 C35 C38 C39 C42 C43 C46 C47 C50 C51 C54 C55 C58 C59 = SparkFun-Capacitors; PROD_ID: CAP-00868
D1-D30 = SparkFun-DiscreteSemi; PROD_ID: DIO-11018
E$1 = SparkFun-Retired
E$4 E$5 FID1-FID30 JP4 JP6 JP11 JP13 JP18 JP20 JP25 JP27 JP32 JP34 JP39 JP41 JP46 JP48 JP53 JP55 JP60 JP62 JP67 JP69 JP74 JP76 JP81 JP83 JP88 JP90 JP95 JP97 JP102 JP104 U$2 U$3 U$6 U$8 U$10 U$12 U$14 U$16 U$18 U$20 U$22 U$24 U$26 U$28 U$30 = SparkFun-Aesthetics
J1-J15 JP1 JP3 JP5 JP7 JP9 JP10 JP12 JP14 JP16 JP17 JP19 JP21 JP23 JP24 JP26 JP28 JP30 JP31 JP33 JP35 JP37 JP38 JP40 JP42 JP44 JP45 JP47 JP49 JP51 JP52 JP54 JP56 JP58 JP59 JP61 JP63 JP65 JP66 JP68 JP70 JP72 JP73 JP75 JP77 JP79 JP80 JP82 JP84 JP86 JP87 JP89 JP91 JP93 JP94 JP96 JP98 JP100 JP101 JP103 JP105 = SparkFun-Connectors
JP2 JP8 JP15 JP22 JP29 JP36 JP43 JP50 JP57 JP64 JP71 JP78 JP85 JP92 JP99 = SparkFun-Connectors; PROD_ID: CONN-08352
Q1-Q15 = SparkFun-DiscreteSemi; PROD_ID: TRANS-07913
R1 R2 R5 R6 R9 R10 R13 R14 R17 R18 R21 R22 R25 R26 R29 R30 R33 R34 R37 R38 R41 R42 R45 R46 R49 R50 R53 R54 R57 R58 = SparkFun-Resistors; PROD_ID: RES-07868
R3 R4 R7 R8 R11 R12 R15 R16 R19 R20 R23 R24 R27 R28 R31 R32 R35 R36 R39 R40 R43 R44 R47 R48 R51 R52 R55 R56 R59 R60 = SparkFun-Resistors; PROD_ID: RES-00824
U1 U4 U7 U10 U13 U16 U19 U22 U25 U28 U31 U34 U37 U40 U43 = SparkFun-Sensors
U2 U5 U8 U11 U14 U17 U20 U23 U26 U29 U32 U35 U38 U41 U44 = SparkFun-DigitalIC; DIST: DIGIKEY; DIST_ID: ATTINY2313A-SU-ND; PROD_ID: IC-11305
U3 U6 U9 U12 U15 U18 U21 U24 U27 U30 U33 U36 U39 U42 U45 = SparkFun-PowerIC; DIST: Digikey; DIST_ID: ADP160AUJZ-3.3-R7TR-ND; PROD_ID: VREG-11306
U$1 U$4 U$5 U$7 U$9 U$11 U$13 U$15 U$17 U$19 U$21 U$23 U$25 U$27 U$29 = Testing

## Nets
3.3V: C1.1 C3.1 C4.1 J1.2 R3.1 R4.1 U1.P$1 U1.P$14 U2.20 U3.5
3.3V1: C5.1 C7.1 C8.1 J2.2 R7.1 R8.1 U4.P$1 U4.P$14 U5.20 U6.5
3.3V2: C9.1 C11.1 C12.1 J3.2 R11.1 R12.1 U7.P$1 U7.P$14 U8.20 U9.5
3.3V3: C13.1 C15.1 C16.1 J4.2 R15.1 R16.1 U10.P$1 U10.P$14 U11.20 U12.5
3.3V4: C17.1 C19.1 C20.1 J5.2 R19.1 R20.1 U13.P$1 U13.P$14 U14.20 U15.5
3.3V5: C21.1 C23.1 C24.1 J6.2 R23.1 R24.1 U16.P$1 U16.P$14 U17.20 U18.5
3.3V6: C25.1 C27.1 C28.1 J7.2 R27.1 R28.1 U19.P$1 U19.P$14 U20.20 U21.5
3.3V7: C29.1 C31.1 C32.1 J8.2 R31.1 R32.1 U22.P$1 U22.P$14 U23.20 U24.5
3.3V8: C33.1 C35.1 C36.1 J9.2 R35.1 R36.1 U25.P$1 U25.P$14 U26.20 U27.5
3.3V9: C37.1 C39.1 C40.1 J10.2 R39.1 R40.1 U28.P$1 U28.P$14 U29.20 U30.5
3.3V10: C41.1 C43.1 C44.1 J11.2 R43.1 R44.1 U31.P$1 U31.P$14 U32.20 U33.5
3.3V11: C45.1 C47.1 C48.1 J12.2 R47.1 R48.1 U34.P$1 U34.P$14 U35.20 U36.5
3.3V12: C49.1 C51.1 C52.1 J13.2 R51.1 R52.1 U37.P$1 U37.P$14 U38.20 U39.5
3.3V13: C53.1 C55.1 C56.1 J14.2 R55.1 R56.1 U40.P$1 U40.P$14 U41.20 U42.5
3.3V14: C57.1 C59.1 C60.1 J15.2 R59.1 R60.1 U43.P$1 U43.P$14 U44.20 U45.5
ACTIVE: D2.A U2.8
ACTIVE1: D4.A U5.8
ACTIVE2: D6.A U8.8
ACTIVE3: D8.A U11.8
ACTIVE4: D10.A U14.8
ACTIVE5: D12.A U17.8
ACTIVE6: D14.A U20.8
ACTIVE7: D16.A U23.8
ACTIVE8: D18.A U26.8
ACTIVE9: D20.A U29.8
ACTIVE10: D22.A U32.8
ACTIVE11: D24.A U35.8
ACTIVE12: D26.A U38.8
ACTIVE13: D28.A U41.8
ACTIVE14: D30.A U44.8
GND: C1.2 C2.2 C3.2 C4.2 J1.6 JP1.P$6 JP2.1 JP3.3 JP5.2 Q1.1 R2.1 U1.P$12 U1.P$13 U1.P$16 U2.10 U3.2
GND1: C5.2 C6.2 C7.2 C8.2 J2.6 JP8.1 JP9.3 JP10.P$6 JP12.2 Q2.1 R6.1 U4.P$12 U4.P$13 U4.P$16 U5.10 U6.2
GND2: C9.2 C10.2 C11.2 C12.2 J3.6 JP15.1 JP16.3 JP17.P$6 JP19.2 Q3.1 R10.1 U7.P$12 U7.P$13 U7.P$16 U8.10 U9.2
GND3: C13.2 C14.2 C15.2 C16.2 J4.6 JP22.1 JP23.3 JP24.P$6 JP26.2 Q4.1 R14.1 U10.P$12 U10.P$13 U10.P$16 U11.10 U12.2
GND4: C17.2 C18.2 C19.2 C20.2 J5.6 JP29.1 JP30.3 JP31.P$6 JP33.2 Q5.1 R18.1 U13.P$12 U13.P$13 U13.P$16 U14.10 U15.2
GND5: C21.2 C22.2 C23.2 C24.2 J6.6 JP36.1 JP37.3 JP38.P$6 JP40.2 Q6.1 R22.1 U16.P$12 U16.P$13 U16.P$16 U17.10 U18.2
GND6: C25.2 C26.2 C27.2 C28.2 J7.6 JP43.1 JP44.3 JP45.P$6 JP47.2 Q7.1 R26.1 U19.P$12 U19.P$13 U19.P$16 U20.10 U21.2
GND7: C29.2 C30.2 C31.2 C32.2 J8.6 JP50.1 JP51.3 JP52.P$6 JP54.2 Q8.1 R30.1 U22.P$12 U22.P$13 U22.P$16 U23.10 U24.2
GND8: C33.2 C34.2 C35.2 C36.2 J9.6 JP57.1 JP58.3 JP59.P$6 JP61.2 Q9.1 R34.1 U25.P$12 U25.P$13 U25.P$16 U26.10 U27.2
GND9: C37.2 C38.2 C39.2 C40.2 J10.6 JP64.1 JP65.3 JP66.P$6 JP68.2 Q10.1 R38.1 U28.P$12 U28.P$13 U28.P$16 U29.10 U30.2
GND10: C41.2 C42.2 C43.2 C44.2 J11.6 JP71.1 JP72.3 JP73.P$6 JP75.2 Q11.1 R42.1 U31.P$12 U31.P$13 U31.P$16 U32.10 U33.2
GND11: C45.2 C46.2 C47.2 C48.2 J12.6 JP78.1 JP79.3 JP80.P$6 JP82.2 Q12.1 R46.1 U34.P$12 U34.P$13 U34.P$16 U35.10 U36.2
GND12: C49.2 C50.2 C51.2 C52.2 J13.6 JP85.1 JP86.3 JP87.P$6 JP89.2 Q13.1 R50.1 U37.P$12 U37.P$13 U37.P$16 U38.10 U39.2
GND13: C53.2 C54.2 C55.2 C56.2 J14.6 JP92.1 JP93.3 JP94.P$6 JP96.2 Q14.1 R54.1 U40.P$12 U40.P$13 U40.P$16 U41.10 U42.2
GND14: C57.2 C58.2 C59.2 C60.2 J15.6 JP99.1 JP100.3 JP101.P$6 JP103.2 Q15.1 R58.1 U43.P$12 U43.P$13 U43.P$16 U44.10 U45.2
INT1: U1.P$11 U2.7
INT2: U4.P$11 U5.7
INT3: U7.P$11 U8.7
INT4: U10.P$11 U11.7
INT5: U13.P$11 U14.7
INT6: U16.P$11 U17.7
INT7: U19.P$11 U20.7
INT8: U22.P$11 U23.7
INT9: U25.P$11 U26.7
INT10: U28.P$11 U29.7
INT11: U31.P$11 U32.7
INT12: U34.P$11 U35.7
INT13: U37.P$11 U38.7
INT14: U40.P$11 U41.7
INT15: U43.P$11 U44.7
MISO: J1.1 U1.P$6 U2.18
MISO1: J2.1 U4.P$6 U5.18
MISO2: J3.1 U7.P$6 U8.18
MISO3: J4.1 U10.P$6 U11.18
MISO4: J5.1 U13.P$6 U14.18
MISO5: J6.1 U16.P$6 U17.18
MISO6: J7.1 U19.P$6 U20.18
MISO7: J8.1 U22.P$6 U23.18
MISO8: J9.1 U25.P$6 U26.18
MISO9: J10.1 U28.P$6 U29.18
MISO10: J11.1 U31.P$6 U32.18
MISO11: J12.1 U34.P$6 U35.18
MISO12: J13.1 U37.P$6 U38.18
MISO13: J14.1 U40.P$6 U41.18
MISO14: J15.1 U43.P$6 U44.18
MOSI: J1.4 U1.P$7 U2.17
MOSI1: J2.4 U4.P$7 U5.17
MOSI2: J3.4 U7.P$7 U8.17
MOSI3: J4.4 U10.P$7 U11.17
MOSI4: J5.4 U13.P$7 U14.17
MOSI5: J6.4 U16.P$7 U17.17
MOSI6: J7.4 U19.P$7 U20.17
MOSI7: J8.4 U22.P$7 U23.17
MOSI8: J9.4 U25.P$7 U26.17
MOSI9: J10.4 U28.P$7 U29.17
MOSI10: J11.4 U31.P$7 U32.17
MOSI11: J12.4 U34.P$7 U35.17
MOSI12: J13.4 U37.P$7 U38.17
MOSI13: J14.4 U40.P$7 U41.17
MOSI14: J15.4 U43.P$7 U44.17
N$1: Q1.4 Q1.7 Q1.8 R1.2
N$2: D1.C D2.C Q1.2 R2.2
N$3: JP7.1 U2.15
N$4: JP7.2 U2.14
N$5: JP7.3 U2.13
N$6: JP7.4 U2.12
N$7: U1.P$8 U2.16
N$8: JP7.5 U2.11
N$9: Q2.4 Q2.7 Q2.8 R5.2
N$10: D3.C D4.C Q2.2 R6.2
N$11: U4.P$8 U5.16
N$12: JP14.1 U5.15
N$13: JP14.2 U5.14
N$14: JP14.3 U5.13
N$15: JP14.4 U5.12
N$16: JP14.5 U5.11
N$17: Q3.4 Q3.7 Q3.8 R9.2
N$18: D5.C D6.C Q3.2 R10.2
N$19: U7.P$8 U8.16
N$20: JP21.1 U8.15
N$21: JP21.2 U8.14
N$22: JP21.3 U8.13
N$23: JP21.4 U8.12
N$24: JP21.5 U8.11
N$25: Q4.4 Q4.7 Q4.8 R13.2
N$26: D7.C D8.C Q4.2 R14.2
N$27: U10.P$8 U11.16
N$28: JP28.1 U11.15
N$29: JP28.2 U11.14
N$30: JP28.3 U11.13
N$31: JP28.4 U11.12
N$32: JP28.5 U11.11
N$33: Q5.4 Q5.7 Q5.8 R17.2
N$34: D9.C D10.C Q5.2 R18.2
N$35: U13.P$8 U14.16
N$36: JP35.1 U14.15
N$37: JP35.2 U14.14
N$38: JP35.3 U14.13
N$39: JP35.4 U14.12
N$40: JP35.5 U14.11
N$41: Q6.4 Q6.7 Q6.8 R21.2
N$42: D11.C D12.C Q6.2 R22.2
N$43: U16.P$8 U17.16
N$44: JP42.1 U17.15
N$45: JP42.2 U17.14
N$46: JP42.3 U17.13
N$47: JP42.4 U17.12
N$48: JP42.5 U17.11
N$49: Q7.4 Q7.7 Q7.8 R25.2
N$50: D13.C D14.C Q7.2 R26.2
N$51: U19.P$8 U20.16
N$52: JP49.1 U20.15
N$53: JP49.2 U20.14
N$54: JP49.3 U20.13
N$55: JP49.4 U20.12
N$56: JP49.5 U20.11
N$57: Q8.4 Q8.7 Q8.8 R29.2
N$58: D15.C D16.C Q8.2 R30.2
N$59: U22.P$8 U23.16
N$60: JP56.1 U23.15
N$61: JP56.2 U23.14
N$62: JP56.3 U23.13
N$63: JP56.4 U23.12
N$64: JP56.5 U23.11
N$65: Q9.4 Q9.7 Q9.8 R33.2
N$66: D17.C D18.C Q9.2 R34.2
N$67: U25.P$8 U26.16
N$68: JP63.1 U26.15
N$69: JP63.2 U26.14
N$70: JP63.3 U26.13
N$71: JP63.4 U26.12
N$72: JP63.5 U26.11
N$73: Q10.4 Q10.7 Q10.8 R37.2
N$74: D19.C D20.C Q10.2 R38.2
N$75: U28.P$8 U29.16
N$76: JP70.1 U29.15
N$77: JP70.2 U29.14
N$78: JP70.3 U29.13
N$79: JP70.4 U29.12
N$80: JP70.5 U29.11
N$81: Q11.4 Q11.7 Q11.8 R41.2
N$82: D21.C D22.C Q11.2 R42.2
N$83: U31.P$8 U32.16
N$84: JP77.1 U32.15
N$85: JP77.2 U32.14
N$86: JP77.3 U32.13
N$87: JP77.4 U32.12
N$88: JP77.5 U32.11
N$89: Q12.4 Q12.7 Q12.8 R45.2
N$90: D23.C D24.C Q12.2 R46.2
N$91: U34.P$8 U35.16
N$92: JP84.1 U35.15
N$93: JP84.2 U35.14
N$94: JP84.3 U35.13
N$95: JP84.4 U35.12
N$96: JP84.5 U35.11
N$97: Q13.4 Q13.7 Q13.8 R49.2
N$98: D25.C D26.C Q13.2 R50.2
N$99: U37.P$8 U38.16
N$100: JP91.1 U38.15
N$101: JP91.2 U38.14
N$102: JP91.3 U38.13
N$103: JP91.4 U38.12
N$104: JP91.5 U38.11
N$105: Q14.4 Q14.7 Q14.8 R53.2
N$106: D27.C D28.C Q14.2 R54.2
N$107: U40.P$8 U41.16
N$108: JP98.1 U41.15
N$109: JP98.2 U41.14
N$110: JP98.3 U41.13
N$111: JP98.4 U41.12
N$112: JP98.5 U41.11
N$113: Q15.4 Q15.7 Q15.8 R57.2
N$114: D29.C D30.C Q15.2 R58.2
N$115: U43.P$8 U44.16
N$116: JP105.1 U44.15
N$117: JP105.2 U44.14
N$118: JP105.3 U44.13
N$119: JP105.4 U44.12
N$120: JP105.5 U44.11
OVERRIDE: D1.A JP3.1
OVERRIDE1: D3.A JP9.1
OVERRIDE2: D5.A JP16.1
OVERRIDE3: D7.A JP23.1
OVERRIDE4: D9.A JP30.1
OVERRIDE5: D11.A JP37.1
OVERRIDE6: D13.A JP44.1
OVERRIDE7: D15.A JP51.1
OVERRIDE8: D17.A JP58.1
OVERRIDE9: D19.A JP65.1
OVERRIDE10: D21.A JP72.1
OVERRIDE11: D23.A JP79.1
OVERRIDE12: D25.A JP86.1
OVERRIDE13: D27.A JP93.1
OVERRIDE14: D29.A JP100.1
RESET: J1.5 R3.2 U2.1
RESET1: J2.5 R7.2 U5.1
RESET2: J3.5 R11.2 U8.1
RESET3: J4.5 R15.2 U11.1
RESET4: J5.5 R19.2 U14.1
RESET5: J6.5 R23.2 U17.1
RESET6: J7.5 R27.2 U20.1
RESET7: J8.5 R31.2 U23.1
RESET8: J9.5 R35.2 U26.1
RESET9: J10.5 R39.2 U29.1
RESET10: J11.5 R43.2 U32.1
RESET11: J12.5 R47.2 U35.1
RESET12: J13.5 R51.2 U38.1
RESET13: J14.5 R55.2 U41.1
RESET14: J15.5 R59.2 U44.1
RXI: JP1.P$3 R4.2 U2.2 U2.6
RXI1: JP10.P$3 R8.2 U5.2 U5.6
RXI2: JP17.P$3 R12.2 U8.2 U8.6
RXI3: JP24.P$3 R16.2 U11.2 U11.6
RXI4: JP31.P$3 R20.2 U14.2 U14.6
RXI5: JP38.P$3 R24.2 U17.2 U17.6
RXI6: JP45.P$3 R28.2 U20.2 U20.6
RXI7: JP52.P$3 R32.2 U23.2 U23.6
RXI8: JP59.P$3 R36.2 U26.2 U26.6
RXI9: JP66.P$3 R40.2 U29.2 U29.6
RXI10: JP73.P$3 R44.2 U32.2 U32.6
RXI11: JP80.P$3 R48.2 U35.2 U35.6
RXI12: JP87.P$3 R52.2 U38.2 U38.6
RXI13: JP94.P$3 R56.2 U41.2 U41.6
RXI14: JP101.P$3 R60.2 U44.2 U44.6
SCK: J1.3 U1.P$4 U2.19
SCK1: J2.3 U4.P$4 U5.19
SCK2: J3.3 U7.P$4 U8.19
SCK3: J4.3 U10.P$4 U11.19
SCK4: J5.3 U13.P$4 U14.19
SCK5: J6.3 U16.P$4 U17.19
SCK6: J7.3 U19.P$4 U20.19
SCK7: J8.3 U22.P$4 U23.19
SCK8: J9.3 U25.P$4 U26.19
SCK9: J10.3 U28.P$4 U29.19
SCK10: J11.3 U31.P$4 U32.19
SCK11: J12.3 U34.P$4 U35.19
SCK12: J13.3 U37.P$4 U38.19
SCK13: J14.3 U40.P$4 U41.19
SCK14: J15.3 U43.P$4 U44.19
TXO: JP1.P$2 U2.3
TXO1: JP10.P$2 U5.3
TXO2: JP17.P$2 U8.3
TXO3: JP24.P$2 U11.3
TXO4: JP31.P$2 U14.3
TXO5: JP38.P$2 U17.3
TXO6: JP45.P$2 U20.3
TXO7: JP52.P$2 U23.3
TXO8: JP59.P$2 U26.3
TXO9: JP66.P$2 U29.3
TXO10: JP73.P$2 U32.3
TXO11: JP80.P$2 U35.3
TXO12: JP87.P$2 U38.3
TXO13: JP94.P$2 U41.3
TXO14: JP101.P$2 U44.3
V_BATT: C2.1 JP2.2 JP5.1 Q1.3 R1.1 U3.1 U3.3
V_BATT1: C6.1 JP8.2 JP12.1 Q2.3 R5.1 U6.1 U6.3
V_BATT2: C10.1 JP15.2 JP19.1 Q3.3 R9.1 U9.1 U9.3
V_BATT3: C14.1 JP22.2 JP26.1 Q4.3 R13.1 U12.1 U12.3
V_BATT4: C18.1 JP29.2 JP33.1 Q5.3 R17.1 U15.1 U15.3
V_BATT5: C22.1 JP36.2 JP40.1 Q6.3 R21.1 U18.1 U18.3
V_BATT6: C26.1 JP43.2 JP47.1 Q7.3 R25.1 U21.1 U21.3
V_BATT7: C30.1 JP50.2 JP54.1 Q8.3 R29.1 U24.1 U24.3
V_BATT8: C34.1 JP57.2 JP61.1 Q9.3 R33.1 U27.1 U27.3
V_BATT9: C38.1 JP64.2 JP68.1 Q10.3 R37.1 U30.1 U30.3
V_BATT10: C42.1 JP71.2 JP75.1 Q11.3 R41.1 U33.1 U33.3
V_BATT11: C46.1 JP78.2 JP82.1 Q12.3 R45.1 U36.1 U36.3
V_BATT12: C50.1 JP85.2 JP89.1 Q13.3 R49.1 U39.1 U39.3
V_BATT13: C54.1 JP92.2 JP96.1 Q14.3 R53.1 U42.1 U42.3
V_BATT14: C58.1 JP99.2 JP103.1 Q15.3 R57.1 U45.1 U45.3
VOUT: JP3.2 Q1.5 Q1.6
VOUT1: JP9.2 Q2.5 Q2.6
VOUT2: JP16.2 Q3.5 Q3.6
VOUT3: JP23.2 Q4.5 Q4.6
VOUT4: JP30.2 Q5.5 Q5.6
VOUT5: JP37.2 Q6.5 Q6.6
VOUT6: JP44.2 Q7.5 Q7.6
VOUT7: JP51.2 Q8.5 Q8.6
VOUT8: JP58.2 Q9.5 Q9.6
VOUT9: JP65.2 Q10.5 Q10.6
VOUT10: JP72.2 Q11.5 Q11.6
VOUT11: JP79.2 Q12.5 Q12.6
VOUT12: JP86.2 Q13.5 Q13.6
VOUT13: JP93.2 Q14.5 Q14.6
VOUT14: JP100.2 Q15.5 Q15.6

## Tracks (layer width: path | path; a pad name or v marks a point on that pad's centre or on a via)
3.3V  (via drill 0.51)
  Top 0.203: R3.1 C4.1 26.2,18.92 27.3,18.92 27.81,19.43 U2.20 | v13.21,22.1 10.67,22.1 J1.2 | C1.1 18.88,14.99 19.56,14.99 | C3.1 24.41,19.24 U3.5 23.37,19.14
  Top 0.254: C3.1 C4.1 | U1.P$1 19.83,14.21 19.56,14.48 19.56,14.99 19.56,15.49 19.81,15.75 21.72,15.75 | R4.1 v10.67,8.13 | U1.P$14 22.6,15.25 22.1,15.75 21.72,15.75 | 21.72,15.75 21.72,17.91 22.1,18.29 22.86,18.29 23.24,18.67 23.24,19.21 U3.5 23.27,20.04 v22.48,20.83
  Bottom 0.203: v22.48,20.83 17.02,20.83 15.75,22.1 v13.21,22.1
  Bottom 0.254: v10.67,8.13 8,8.13 7.37,8.76 7.37,22.61 8.13,23.37 J1.2
3.3V1  (via drill 0.51)
  Top 0.203: R7.1 C8.1 69.89,18.92 70.99,18.92 71.5,19.43 U5.20 | v56.9,22.1 54.36,22.1 J2.2 | C5.1 62.57,14.99 63.25,14.99 | C7.1 68.1,19.24 U6.5 67.06,19.14
  Top 0.254: C7.1 C8.1 | U4.P$1 63.52,14.21 63.25,14.48 63.25,14.99 63.25,15.49 63.5,15.75 65.41,15.75 | R8.1 v54.36,8.13 | U4.P$14 66.29,15.25 65.79,15.75 65.41,15.75 | 65.41,15.75 65.41,17.91 65.79,18.29 66.55,18.29 66.93,18.67 66.93,19.21 U6.5 66.96,20.04 v66.17,20.83
  Bottom 0.203: v66.17,20.83 60.71,20.83 59.44,22.1 v56.9,22.1
  Bottom 0.254: v54.36,8.13 51.69,8.13 51.05,8.76 51.05,22.61 51.82,23.37 J2.2
3.3V2  (via drill 0.51)
  Top 0.203: R11.1 C12.1 113.58,18.92 114.68,18.92 115.19,19.43 U8.20 | v100.58,22.1 98.04,22.1 J3.2 | C9.1 106.26,14.99 106.93,14.99 | C11.1 111.79,19.24 U9.5 110.74,19.14
  Top 0.254: C11.1 C12.1 | U7.P$1 107.2,14.21 106.93,14.48 106.93,14.99 106.93,15.49 107.19,15.75 109.09,15.75 | R12.1 v98.04,8.13 | U7.P$14 109.97,15.25 109.47,15.75 109.09,15.75 | 109.09,15.75 109.09,17.91 109.47,18.29 110.24,18.29 110.62,18.67 110.62,19.21 U9.5 110.65,20.04 v109.86,20.83
  Bottom 0.203: v109.86,20.83 104.39,20.83 103.12,22.1 v100.58,22.1
  Bottom 0.254: v98.04,8.13 95.38,8.13 94.74,8.76 94.74,22.61 95.5,23.37 J3.2
3.3V3  (via drill 0.51)
  Top 0.203: R15.1 C16.1 26.2,43.56 27.3,43.56 27.81,44.07 U11.20 | v13.21,46.74 10.67,46.74 J4.2 | C13.1 18.88,39.62 19.56,39.62 | C15.1 24.41,43.88 U12.5 23.37,43.78
  Top 0.254: C15.1 C16.1 | U10.P$1 19.83,38.85 19.56,39.12 19.56,39.62 19.56,40.13 19.81,40.39 21.72,40.39 | R16.1 v10.67,32.77 | U10.P$14 22.6,39.89 22.1,40.39 21.72,40.39 | 21.72,40.39 21.72,42.55 22.1,42.93 22.86,42.93 23.24,43.31 23.24,43.85 U12.5 23.27,44.67 v22.48,45.47
  Bottom 0.203: v22.48,45.47 17.02,45.47 15.75,46.74 v13.21,46.74
  Bottom 0.254: v10.67,32.77 8,32.77 7.37,33.4 7.37,47.24 8.13,48.01 J4.2
3.3V4  (via drill 0.51)
  Top 0.203: R19.1 C20.1 69.89,43.56 70.99,43.56 71.5,44.07 U14.20 | v56.9,46.74 54.36,46.74 J5.2 | C17.1 62.57,39.62 63.25,39.62 | C19.1 68.1,43.88 U15.5 67.06,43.78
  Top 0.254: C19.1 C20.1 | U13.P$1 63.52,38.85 63.25,39.12 63.25,39.62 63.25,40.13 63.5,40.39 65.41,40.39 | R20.1 v54.36,32.77 | U13.P$14 66.29,39.89 65.79,40.39 65.41,40.39 | 65.41,40.39 65.41,42.55 65.79,42.93 66.55,42.93 66.93,43.31 66.93,43.85 U15.5 66.96,44.67 v66.17,45.47
  Bottom 0.203: v66.17,45.47 60.71,45.47 59.44,46.74 v56.9,46.74
  Bottom 0.254: v54.36,32.77 51.69,32.77 51.05,33.4 51.05,47.24 51.82,48.01 J5.2
3.3V5  (via drill 0.51)
  Top 0.203: R23.1 C24.1 113.58,43.56 114.68,43.56 115.19,44.07 U17.20 | v100.58,46.74 98.04,46.74 J6.2 | C21.1 106.26,39.62 106.93,39.62 | C23.1 111.79,43.88 U18.5 110.74,43.78
  Top 0.254: C23.1 C24.1 | U16.P$1 107.2,38.85 106.93,39.12 106.93,39.62 106.93,40.13 107.19,40.39 109.09,40.39 | R24.1 v98.04,32.77 | U16.P$14 109.97,39.89 109.47,40.39 109.09,40.39 | 109.09,40.39 109.09,42.55 109.47,42.93 110.24,42.93 110.62,43.31 110.62,43.85 U18.5 110.65,44.67 v109.86,45.47
  Bottom 0.203: v109.86,45.47 104.39,45.47 103.12,46.74 v100.58,46.74
  Bottom 0.254: v98.04,32.77 95.38,32.77 94.74,33.4 94.74,47.24 95.5,48.01 J6.2
3.3V6  (via drill 0.51)
  Top 0.203: R27.1 C28.1 26.2,68.2 27.3,68.2 27.81,68.71 U20.20 | v13.21,71.37 10.67,71.37 J7.2 | C25.1 18.88,64.26 19.56,64.26 | C27.1 24.41,68.51 U21.5 23.37,68.42
  Top 0.254: C27.1 C28.1 | U19.P$1 19.83,63.48 19.56,63.75 19.56,64.26 19.56,64.77 19.81,65.02 21.72,65.02 | R28.1 v10.67,57.4 | U19.P$14 22.6,64.52 22.1,65.02 21.72,65.02 | 21.72,65.02 21.72,67.18 22.1,67.56 22.86,67.56 23.24,67.94 23.24,68.48 U21.5 23.27,69.31 v22.48,70.1
  Bottom 0.203: v22.48,70.1 17.02,70.1 15.75,71.37 v13.21,71.37
  Bottom 0.254: v10.67,57.4 8,57.4 7.37,58.04 7.37,71.88 8.13,72.64 J7.2
3.3V7  (via drill 0.51)
  Top 0.203: R31.1 C32.1 69.89,68.2 70.99,68.2 71.5,68.71 U23.20 | v56.9,71.37 54.36,71.37 J8.2 | C29.1 62.57,64.26 63.25,64.26 | C31.1 68.1,68.51 U24.5 67.06,68.42
  Top 0.254: C31.1 C32.1 | U22.P$1 63.52,63.48 63.25,63.75 63.25,64.26 63.25,64.77 63.5,65.02 65.41,65.02 | R32.1 v54.36,57.4 | U22.P$14 66.29,64.52 65.79,65.02 65.41,65.02 | 65.41,65.02 65.41,67.18 65.79,67.56 66.55,67.56 66.93,67.94 66.93,68.48 U24.5 66.96,69.31 v66.17,70.1
  Bottom 0.203: v66.17,70.1 60.71,70.1 59.44,71.37 v56.9,71.37
  Bottom 0.254: v54.36,57.4 51.69,57.4 51.05,58.04 51.05,71.88 51.82,72.64 J8.2
3.3V8  (via drill 0.51)
  Top 0.203: R35.1 C36.1 113.58,68.2 114.68,68.2 115.19,68.71 U26.20 | v100.58,71.37 98.04,71.37 J9.2 | C33.1 106.26,64.26 106.93,64.26 | C35.1 111.79,68.51 U27.5 110.74,68.42
  Top 0.254: C35.1 C36.1 | U25.P$1 107.2,63.48 106.93,63.75 106.93,64.26 106.93,64.77 107.19,65.02 109.09,65.02 | R36.1 v98.04,57.4 | U25.P$14 109.97,64.52 109.47,65.02 109.09,65.02 | 109.09,65.02 109.09,67.18 109.47,67.56 110.24,67.56 110.62,67.94 110.62,68.48 U27.5 110.65,69.31 v109.86,70.1
  Bottom 0.203: v109.86,70.1 104.39,70.1 103.12,71.37 v100.58,71.37
  Bottom 0.254: v98.04,57.4 95.38,57.4 94.74,58.04 94.74,71.88 95.5,72.64 J9.2
3.3V9  (via drill 0.51)
  Top 0.203: R39.1 C40.1 26.2,92.84 27.3,92.84 27.81,93.34 U29.20 | v13.21,96.01 10.67,96.01 J10.2 | C37.1 18.88,88.9 19.56,88.9 | C39.1 24.41,93.15 U30.5 23.37,93.06
  Top 0.254: C39.1 C40.1 | U28.P$1 19.83,88.12 19.56,88.39 19.56,88.9 19.56,89.41 19.81,89.66 21.72,89.66 | R40.1 v10.67,82.04 | U28.P$14 22.6,89.16 22.1,89.66 21.72,89.66 | 21.72,89.66 21.72,91.82 22.1,92.2 22.86,92.2 23.24,92.58 23.24,93.12 U30.5 23.27,93.95 v22.48,94.74
  Bottom 0.203: v22.48,94.74 17.02,94.74 15.75,96.01 v13.21,96.01
  Bottom 0.254: v10.67,82.04 8,82.04 7.37,82.68 7.37,96.52 8.13,97.28 J10.2
3.3V10  (via drill 0.51)
  Top 0.203: R43.1 C44.1 69.89,92.84 70.99,92.84 71.5,93.34 U32.20 | v56.9,96.01 54.36,96.01 J11.2 | C41.1 62.57,88.9 63.25,88.9 | C43.1 68.1,93.15 U33.5 67.06,93.06
  Top 0.254: C43.1 C44.1 | U31.P$1 63.52,88.12 63.25,88.39 63.25,88.9 63.25,89.41 63.5,89.66 65.41,89.66 | R44.1 v54.36,82.04 | U31.P$14 66.29,89.16 65.79,89.66 65.41,89.66 | 65.41,89.66 65.41,91.82 65.79,92.2 66.55,92.2 66.93,92.58 66.93,93.12 U33.5 66.96,93.95 v66.17,94.74
  Bottom 0.203: v66.17,94.74 60.71,94.74 59.44,96.01 v56.9,96.01
  Bottom 0.254: v54.36,82.04 51.69,82.04 51.05,82.68 51.05,96.52 51.82,97.28 J11.2
3.3V11  (via drill 0.51)
  Top 0.203: R47.1 C48.1 113.58,92.84 114.68,92.84 115.19,93.34 U35.20 | v100.58,96.01 98.04,96.01 J12.2 | C45.1 106.26,88.9 106.93,88.9 | C47.1 111.79,93.15 U36.5 110.74,93.06
  Top 0.254: C47.1 C48.1 | U34.P$1 107.2,88.12 106.93,88.39 106.93,88.9 106.93,89.41 107.19,89.66 109.09,89.66 | R48.1 v98.04,82.04 | U34.P$14 109.97,89.16 109.47,89.66 109.09,89.66 | 109.09,89.66 109.09,91.82 109.47,92.2 110.24,92.2 110.62,92.58 110.62,93.12 U36.5 110.65,93.95 v109.86,94.74
  Bottom 0.203: v109.86,94.74 104.39,94.74 103.12,96.01 v100.58,96.01
  Bottom 0.254: v98.04,82.04 95.38,82.04 94.74,82.68 94.74,96.52 95.5,97.28 J12.2
3.3V12  (via drill 0.51)
  Top 0.203: R51.1 C52.1 26.2,117.47 27.3,117.47 27.81,117.98 U38.20 | v13.21,120.65 10.67,120.65 J13.2 | C49.1 18.88,113.54 19.56,113.54 | C51.1 24.41,117.79 U39.5 23.37,117.69
  Top 0.254: C51.1 C52.1 | U37.P$1 19.83,112.76 19.56,113.03 19.56,113.54 19.56,114.05 19.81,114.3 21.72,114.3 | R52.1 v10.67,106.68 | U37.P$14 22.6,113.8 22.1,114.3 21.72,114.3 | 21.72,114.3 21.72,116.46 22.1,116.84 22.86,116.84 23.24,117.22 23.24,117.76 U39.5 23.27,118.59 v22.48,119.38
  Bottom 0.203: v22.48,119.38 17.02,119.38 15.75,120.65 v13.21,120.65
  Bottom 0.254: v10.67,106.68 8,106.68 7.37,107.31 7.37,121.16 8.13,121.92 J13.2
3.3V13  (via drill 0.51)
  Top 0.203: R55.1 C56.1 69.89,117.47 70.99,117.47 71.5,117.98 U41.20 | v56.9,120.65 54.36,120.65 J14.2 | C53.1 62.57,113.54 63.25,113.54 | C55.1 68.1,117.79 U42.5 67.06,117.69
  Top 0.254: C55.1 C56.1 | U40.P$1 63.52,112.76 63.25,113.03 63.25,113.54 63.25,114.05 63.5,114.3 65.41,114.3 | R56.1 v54.36,106.68 | U40.P$14 66.29,113.8 65.79,114.3 65.41,114.3 | 65.41,114.3 65.41,116.46 65.79,116.84 66.55,116.84 66.93,117.22 66.93,117.76 U42.5 66.96,118.59 v66.17,119.38
  Bottom 0.203: v66.17,119.38 60.71,119.38 59.44,120.65 v56.9,120.65
  Bottom 0.254: v54.36,106.68 51.69,106.68 51.05,107.31 51.05,121.16 51.82,121.92 J14.2
3.3V14  (via drill 0.51)
  Top 0.203: R59.1 C60.1 113.58,117.47 114.68,117.47 115.19,117.98 U44.20 | v100.58,120.65 98.04,120.65 J15.2 | C57.1 106.26,113.54 106.93,113.54 | C59.1 111.79,117.79 U45.5 110.74,117.69
  Top 0.254: C59.1 C60.1 | U43.P$1 107.2,112.76 106.93,113.03 106.93,113.54 106.93,114.05 107.19,114.3 109.09,114.3 | R60.1 v98.04,106.68 | U43.P$14 109.97,113.8 109.47,114.3 109.09,114.3 | 109.09,114.3 109.09,116.46 109.47,116.84 110.24,116.84 110.62,117.22 110.62,117.76 U45.5 110.65,118.59 v109.86,119.38
  Bottom 0.203: v109.86,119.38 104.39,119.38 103.12,120.65 v100.58,120.65
  Bottom 0.254: v98.04,106.68 95.38,106.68 94.74,107.31 94.74,121.16 95.5,121.92 J15.2
ACTIVE
  Top 0.203: U2.8 36.7,15.11 37.34,15.75 40.45,15.75 D2.A
ACTIVE1
  Top 0.203: U5.8 80.39,15.11 81.03,15.75 84.14,15.75 D4.A
ACTIVE2
  Top 0.203: U8.8 124.08,15.11 124.71,15.75 127.82,15.75 D6.A
ACTIVE3
  Top 0.203: U11.8 36.7,39.75 37.34,40.39 40.45,40.39 D8.A
ACTIVE4
  Top 0.203: U14.8 80.39,39.75 81.03,40.39 84.14,40.39 D10.A
ACTIVE5
  Top 0.203: U17.8 124.08,39.75 124.71,40.39 127.82,40.39 D12.A
ACTIVE6
  Top 0.203: U20.8 36.7,64.39 37.34,65.02 40.45,65.02 D14.A
ACTIVE7
  Top 0.203: U23.8 80.39,64.39 81.03,65.02 84.14,65.02 D16.A
ACTIVE8
  Top 0.203: U26.8 124.08,64.39 124.71,65.02 127.82,65.02 D18.A
ACTIVE9
  Top 0.203: U29.8 36.7,89.03 37.34,89.66 40.45,89.66 D20.A
ACTIVE10
  Top 0.203: U32.8 80.39,89.03 81.03,89.66 84.14,89.66 D22.A
ACTIVE11
  Top 0.203: U35.8 124.08,89.03 124.71,89.66 127.82,89.66 D24.A
ACTIVE12
  Top 0.203: U38.8 36.7,113.67 37.34,114.3 40.45,114.3 D26.A
ACTIVE13
  Top 0.203: U41.8 80.39,113.67 81.03,114.3 84.14,114.3 D28.A
ACTIVE14
  Top 0.203: U44.8 124.08,113.67 124.71,114.3 127.82,114.3 D30.A
GND  (via drill 0.51)
  Top 0.203: U1.P$16 21.6,13.71 v22.1,13.21 22.6,13.71 U1.P$12 | Q1.1 18.96,25.61 18.8,25.78 18.8,26.29 | 18.8,26.29 18.8,26.96 R2.1 | v21.59,25.91 21.08,25.91 20.7,26.29 18.8,26.29 | U3.2 v18.92,18.29 18.29,18.92 C2.2
  Top 0.254: U2.10 39.24,12.57 | 39.88,11.94 JP1.P$6 | C3.2 C4.2
  other vias: 18.29,12.45 29.34,17.02 9.14,13.46 9.14,9.27 42.42,13.21 42.42,10.67 10.67,29.72
  pour Bottom (isolate 0.305, rank 6): 6.86,30.99 50.04,30.99 50.04,6.86 6.86,6.86
  pour Top (isolate 0.305, rank 6): 6.86,30.99 50.04,30.99 50.04,6.86 6.86,6.86
GND1  (via drill 0.51)
  Top 0.203: U4.P$16 65.29,13.71 v65.79,13.21 66.29,13.71 U4.P$12 | Q2.1 62.65,25.61 62.48,25.78 62.48,26.29 | 62.48,26.29 62.48,26.96 R6.1 | v65.28,25.91 64.77,25.91 64.39,26.29 62.48,26.29 | U6.2 v62.61,18.29 61.98,18.92 C6.2
  Top 0.254: U5.10 82.93,12.57 | 83.57,11.94 JP10.P$6 | C7.2 C8.2
  other vias: 61.98,12.45 73.03,17.02 52.83,13.46 52.83,9.27 86.11,13.21 86.11,10.67 54.36,29.72
  pour Bottom (isolate 0.305, rank 6): 50.55,30.99 93.73,30.99 93.73,6.86 50.55,6.86
  pour Top (isolate 0.305, rank 6): 50.55,30.99 93.73,30.99 93.73,6.86 50.55,6.86
GND2  (via drill 0.51)
  Top 0.203: U7.P$16 108.97,13.71 v109.47,13.21 109.97,13.71 U7.P$12 | Q3.1 106.34,25.61 106.17,25.78 106.17,26.29 | 106.17,26.29 106.17,26.96 R10.1 | v108.97,25.91 108.46,25.91 108.08,26.29 106.17,26.29 | U9.2 v106.3,18.29 105.66,18.92 C10.2
  Top 0.254: U8.10 126.62,12.57 | 127.25,11.94 JP17.P$6 | C11.2 C12.2
  other vias: 105.66,12.45 116.71,17.02 96.52,13.46 96.52,9.27 129.79,13.21 129.79,10.67 98.04,29.72
  pour Bottom (isolate 0.305, rank 6): 94.23,30.99 137.41,30.99 137.41,6.86 94.23,6.86
  pour Top (isolate 0.305, rank 6): 94.23,30.99 137.41,30.99 137.41,6.86 94.23,6.86
GND3  (via drill 0.51)
  Top 0.203: U10.P$16 21.6,38.35 v22.1,37.85 22.6,38.35 U10.P$12 | Q4.1 18.96,50.25 18.8,50.42 18.8,50.93 | 18.8,50.93 18.8,51.6 R14.1 | v21.59,50.55 21.08,50.55 20.7,50.93 18.8,50.93 | U12.2 v18.92,42.93 18.29,43.56 C14.2
  Top 0.254: U11.10 39.24,37.21 | 39.88,36.58 JP24.P$6 | C15.2 C16.2
  other vias: 18.29,37.08 29.34,41.66 9.14,38.1 9.14,33.91 42.42,37.85 42.42,35.31 10.67,54.36
  pour Bottom (isolate 0.305, rank 6): 6.86,55.63 50.04,55.63 50.04,31.5 6.86,31.5
  pour Top (isolate 0.305, rank 6): 6.86,55.63 50.04,55.63 50.04,31.5 6.86,31.5
GND4  (via drill 0.51)
  Top 0.203: U13.P$16 65.29,38.35 v65.79,37.85 66.29,38.35 U13.P$12 | Q5.1 62.65,50.25 62.48,50.42 62.48,50.93 | 62.48,50.93 62.48,51.6 R18.1 | v65.28,50.55 64.77,50.55 64.39,50.93 62.48,50.93 | U15.2 v62.61,42.93 61.98,43.56 C18.2
  Top 0.254: U14.10 82.93,37.21 | 83.57,36.58 JP31.P$6 | C19.2 C20.2
  other vias: 61.98,37.08 73.03,41.66 52.83,38.1 52.83,33.91 86.11,37.85 86.11,35.31 54.36,54.36
  pour Bottom (isolate 0.305, rank 6): 50.55,55.63 93.73,55.63 93.73,31.5 50.55,31.5
  pour Top (isolate 0.305, rank 6): 50.55,55.63 93.73,55.63 93.73,31.5 50.55,31.5
GND5  (via drill 0.51)
  Top 0.203: U16.P$16 108.97,38.35 v109.47,37.85 109.97,38.35 U16.P$12 | Q6.1 106.34,50.25 106.17,50.42 106.17,50.93 | 106.17,50.93 106.17,51.6 R22.1 | v108.97,50.55 108.46,50.55 108.08,50.93 106.17,50.93 | U18.2 v106.3,42.93 105.66,43.56 C22.2
  Top 0.254: U17.10 126.62,37.21 | 127.25,36.58 JP38.P$6 | C23.2 C24.2
  other vias: 105.66,37.08 116.71,41.66 96.52,38.1 96.52,33.91 129.79,37.85 129.79,35.31 98.04,54.36
  pour Bottom (isolate 0.305, rank 6): 94.23,55.63 137.41,55.63 137.41,31.5 94.23,31.5
  pour Top (isolate 0.305, rank 6): 94.23,55.63 137.41,55.63 137.41,31.5 94.23,31.5
GND6  (via drill 0.51)
  Top 0.203: U19.P$16 21.6,62.98 v22.1,62.48 22.6,62.98 U19.P$12 | Q7.1 18.96,74.89 18.8,75.06 18.8,75.56 | 18.8,75.56 18.8,76.24 R26.1 | v21.59,75.18 21.08,75.18 20.7,75.56 18.8,75.56 | U21.2 v18.92,67.56 18.29,68.2 C26.2
  Top 0.254: U20.10 39.24,61.85 | 39.88,61.21 JP45.P$6 | C27.2 C28.2
  other vias: 18.29,61.72 29.34,66.29 9.14,62.74 9.14,58.55 42.42,62.48 42.42,59.94 10.67,78.99
  pour Bottom (isolate 0.305, rank 6): 6.86,80.26 50.04,80.26 50.04,56.13 6.86,56.13
  pour Top (isolate 0.305, rank 6): 6.86,80.26 50.04,80.26 50.04,56.13 6.86,56.13
GND7  (via drill 0.51)
  Top 0.203: U22.P$16 65.29,62.98 v65.79,62.48 66.29,62.98 U22.P$12 | Q8.1 62.65,74.89 62.48,75.06 62.48,75.56 | 62.48,75.56 62.48,76.24 R30.1 | v65.28,75.18 64.77,75.18 64.39,75.56 62.48,75.56 | U24.2 v62.61,67.56 61.98,68.2 C30.2
  Top 0.254: U23.10 82.93,61.85 | 83.57,61.21 JP52.P$6 | C31.2 C32.2
  other vias: 61.98,61.72 73.03,66.29 52.83,62.74 52.83,58.55 86.11,62.48 86.11,59.94 54.36,78.99
  pour Bottom (isolate 0.305, rank 6): 50.55,80.26 93.73,80.26 93.73,56.13 50.55,56.13
  pour Top (isolate 0.305, rank 6): 50.55,80.26 93.73,80.26 93.73,56.13 50.55,56.13
GND8  (via drill 0.51)
  Top 0.203: U25.P$16 108.97,62.98 v109.47,62.48 109.97,62.98 U25.P$12 | Q9.1 106.34,74.89 106.17,75.06 106.17,75.56 | 106.17,75.56 106.17,76.24 R34.1 | v108.97,75.18 108.46,75.18 108.08,75.56 106.17,75.56 | U27.2 v106.3,67.56 105.66,68.2 C34.2
  Top 0.254: U26.10 126.62,61.85 | 127.25,61.21 JP59.P$6 | C35.2 C36.2
  other vias: 105.66,61.72 116.71,66.29 96.52,62.74 96.52,58.55 129.79,62.48 129.79,59.94 98.04,78.99
  pour Bottom (isolate 0.305, rank 6): 94.23,80.26 137.41,80.26 137.41,56.13 94.23,56.13
  pour Top (isolate 0.305, rank 6): 94.23,80.26 137.41,80.26 137.41,56.13 94.23,56.13
GND9  (via drill 0.51)
  Top 0.203: U28.P$16 21.6,87.62 v22.1,87.12 22.6,87.62 U28.P$12 | Q10.1 18.96,99.53 18.8,99.69 18.8,100.2 | 18.8,100.2 18.8,100.88 R38.1 | v21.59,99.82 21.08,99.82 20.7,100.2 18.8,100.2 | U30.2 v18.92,92.2 18.29,92.84 C38.2
  Top 0.254: U29.10 39.24,86.49 | 39.88,85.85 JP66.P$6 | C39.2 C40.2
  other vias: 18.29,86.36 29.34,90.93 9.14,87.38 9.14,83.19 42.42,87.12 42.42,84.58 10.67,103.63
  pour Bottom (isolate 0.305, rank 6): 6.86,104.9 50.04,104.9 50.04,80.77 6.86,80.77
  pour Top (isolate 0.305, rank 6): 6.86,104.9 50.04,104.9 50.04,80.77 6.86,80.77
GND10  (via drill 0.51)
  Top 0.203: U31.P$16 65.29,87.62 v65.79,87.12 66.29,87.62 U31.P$12 | Q11.1 62.65,99.53 62.48,99.69 62.48,100.2 | 62.48,100.2 62.48,100.88 R42.1 | v65.28,99.82 64.77,99.82 64.39,100.2 62.48,100.2 | U33.2 v62.61,92.2 61.98,92.84 C42.2
  Top 0.254: U32.10 82.93,86.49 | 83.57,85.85 JP73.P$6 | C43.2 C44.2
  other vias: 61.98,86.36 73.03,90.93 52.83,87.38 52.83,83.19 86.11,87.12 86.11,84.58 54.36,103.63
  pour Bottom (isolate 0.305, rank 6): 50.55,104.9 93.73,104.9 93.73,80.77 50.55,80.77
  pour Top (isolate 0.305, rank 6): 50.55,104.9 93.73,104.9 93.73,80.77 50.55,80.77
GND11  (via drill 0.51)
  Top 0.203: U34.P$16 108.97,87.62 v109.47,87.12 109.97,87.62 U34.P$12 | Q12.1 106.34,99.53 106.17,99.69 106.17,100.2 | 106.17,100.2 106.17,100.88 R46.1 | v108.97,99.82 108.46,99.82 108.08,100.2 106.17,100.2 | U36.2 v106.3,92.2 105.66,92.84 C46.2
  Top 0.254: U35.10 126.62,86.49 | 127.25,85.85 JP80.P$6 | C47.2 C48.2
  other vias: 105.66,86.36 116.71,90.93 96.52,87.38 96.52,83.19 129.79,87.12 129.79,84.58 98.04,103.63
  pour Bottom (isolate 0.305, rank 6): 94.23,104.9 137.41,104.9 137.41,80.77 94.23,80.77
  pour Top (isolate 0.305, rank 6): 94.23,104.9 137.41,104.9 137.41,80.77 94.23,80.77
GND12  (via drill 0.51)
  Top 0.203: U37.P$16 21.6,112.26 v22.1,111.76 22.6,112.26 U37.P$12 | Q13.1 18.96,124.17 18.8,124.33 18.8,124.84 | 18.8,124.84 18.8,125.52 R50.1 | v21.59,124.46 21.08,124.46 20.7,124.84 18.8,124.84 | U39.2 v18.92,116.84 18.29,117.47 C50.2
  Top 0.254: U38.10 39.24,111.12 | 39.88,110.49 JP87.P$6 | C51.2 C52.2
  other vias: 18.29,111 29.34,115.57 9.14,112.01 9.14,107.82 42.42,111.76 42.42,109.22 10.67,128.27
  pour Bottom (isolate 0.305, rank 6): 6.86,129.54 50.04,129.54 50.04,105.41 6.86,105.41